# Altium PCB Base.PcbDoc
Units mm, origin at the board's own origin, x right, y up, seen from the top; angles counter-clockwise.
Board outline 79.4 x 68 mm, 4 copper layers (Top Layer, Plane 1, Plane 2, Bottom Layer), stack 1.579 mm thick; 91 components, 45 nets, 292 pads, 283 vias.
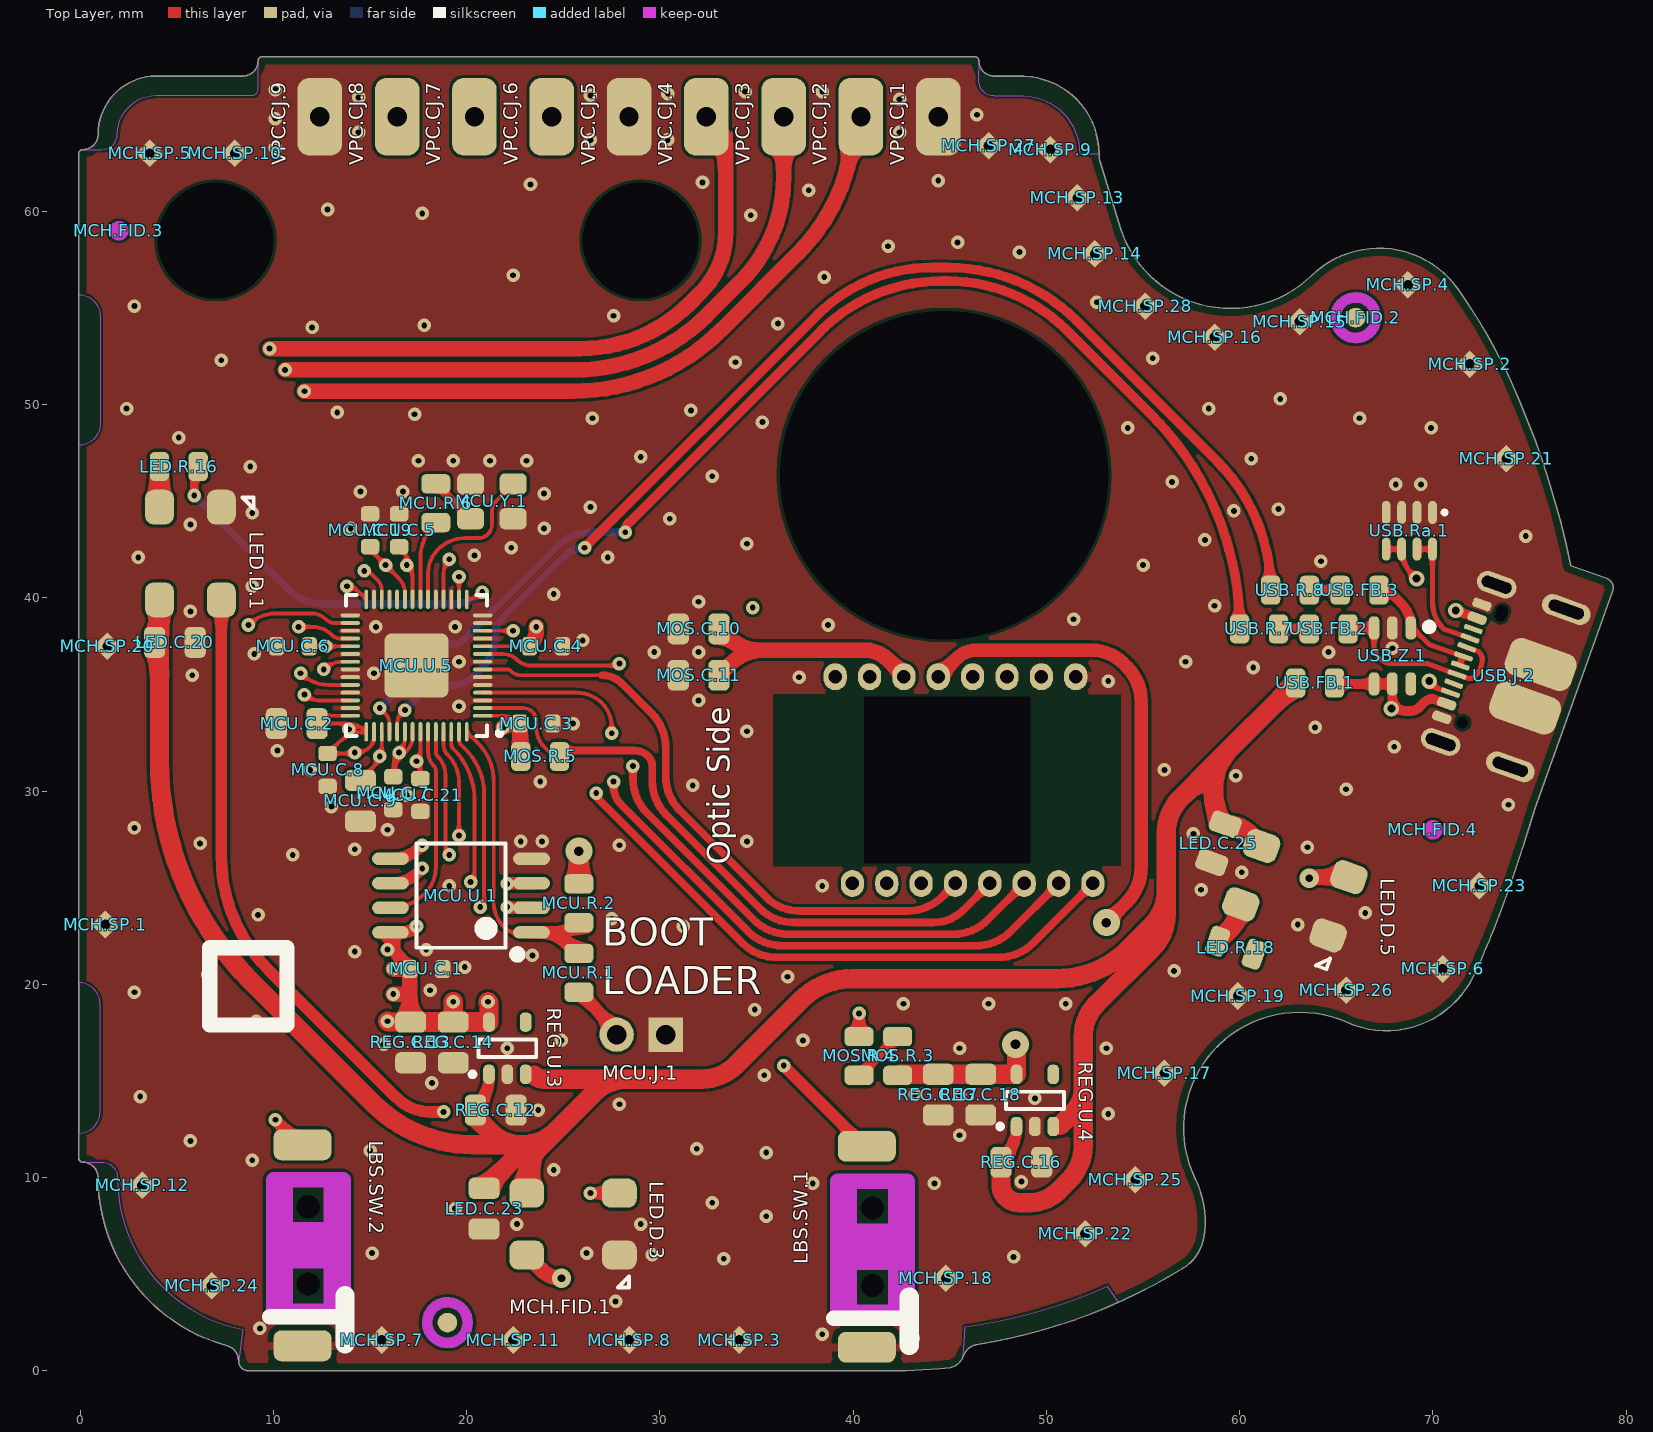
[diagram p0: Top Layer view]
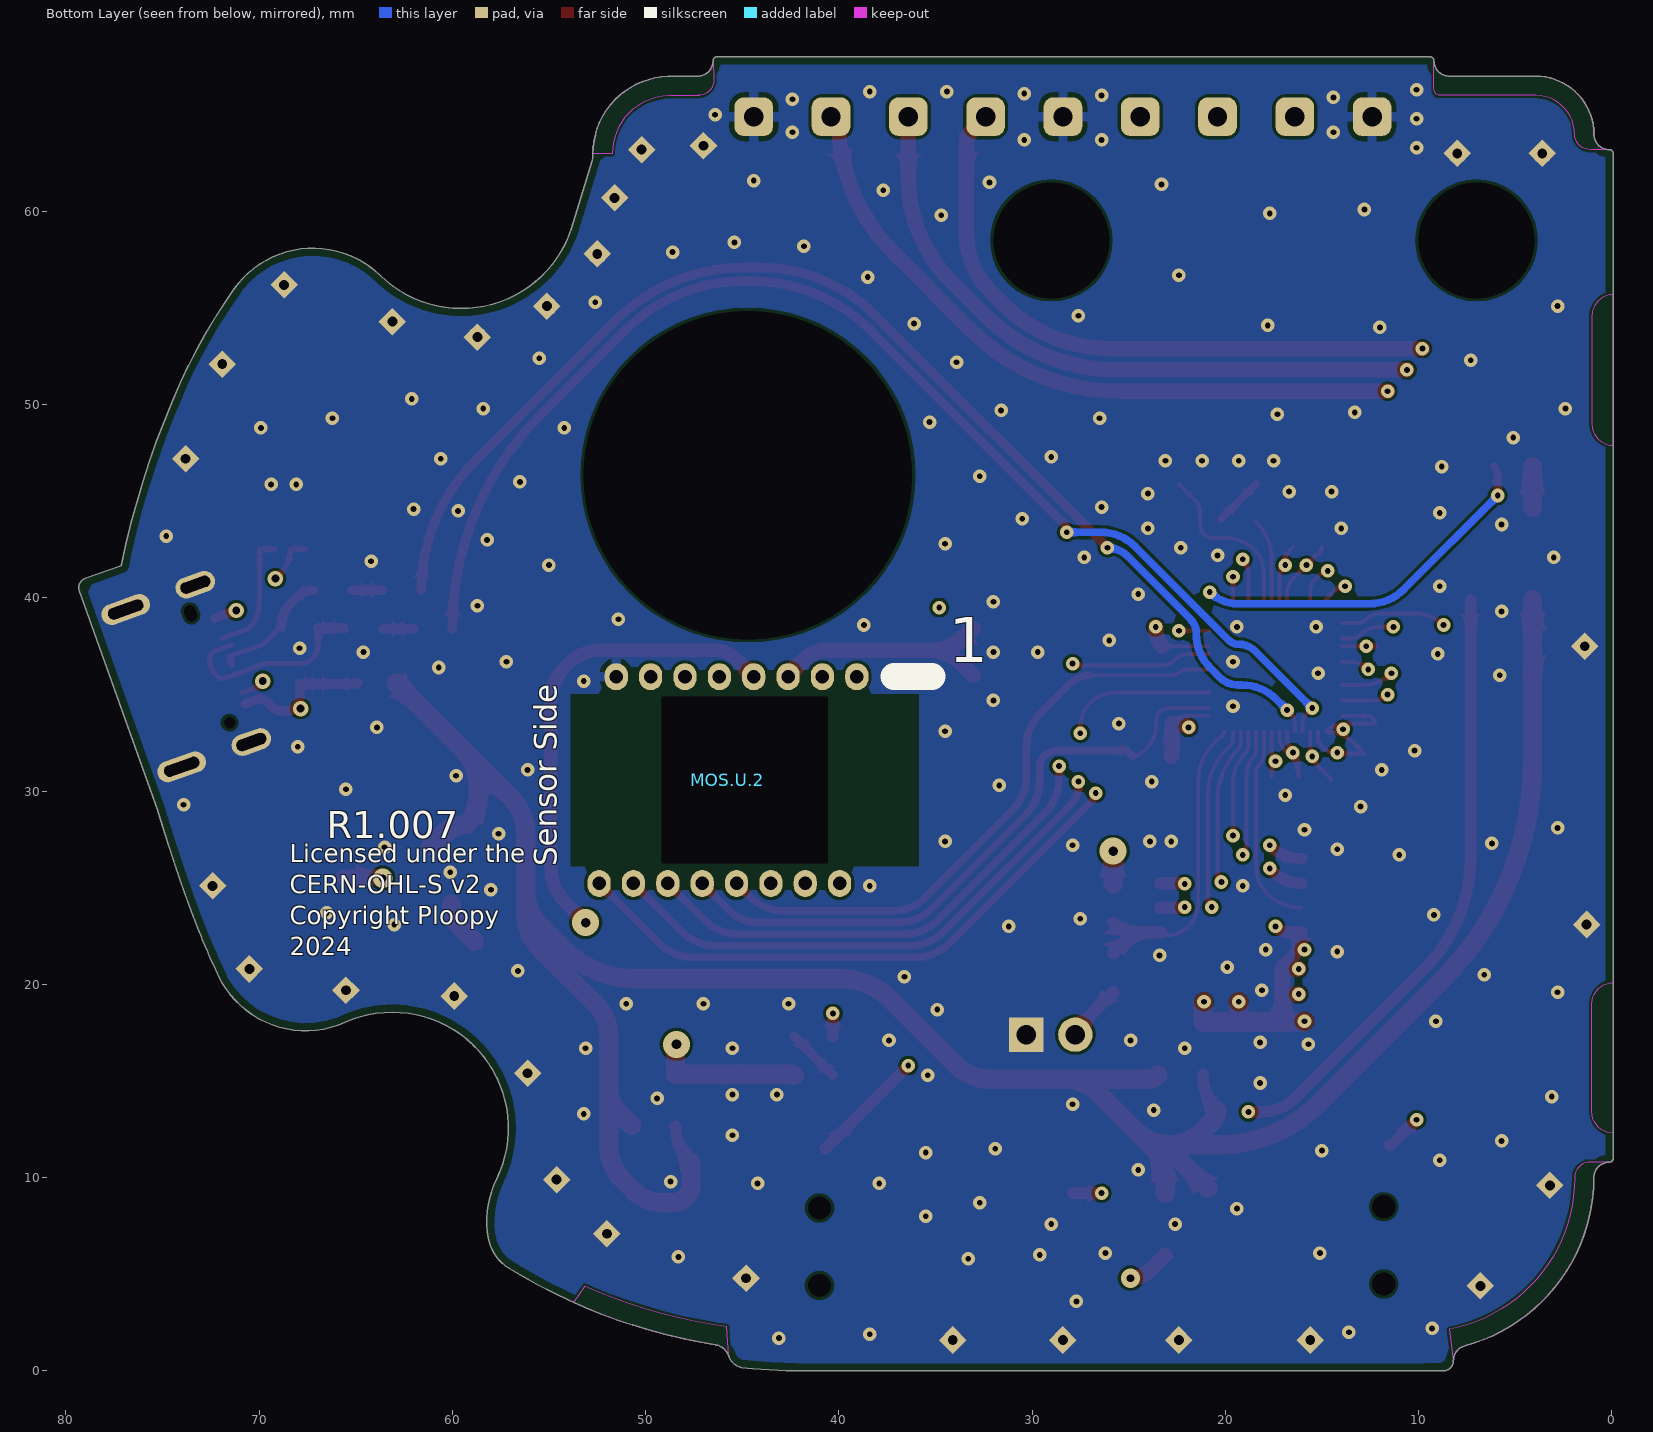
[diagram p1: Bottom Layer view, seen from below]
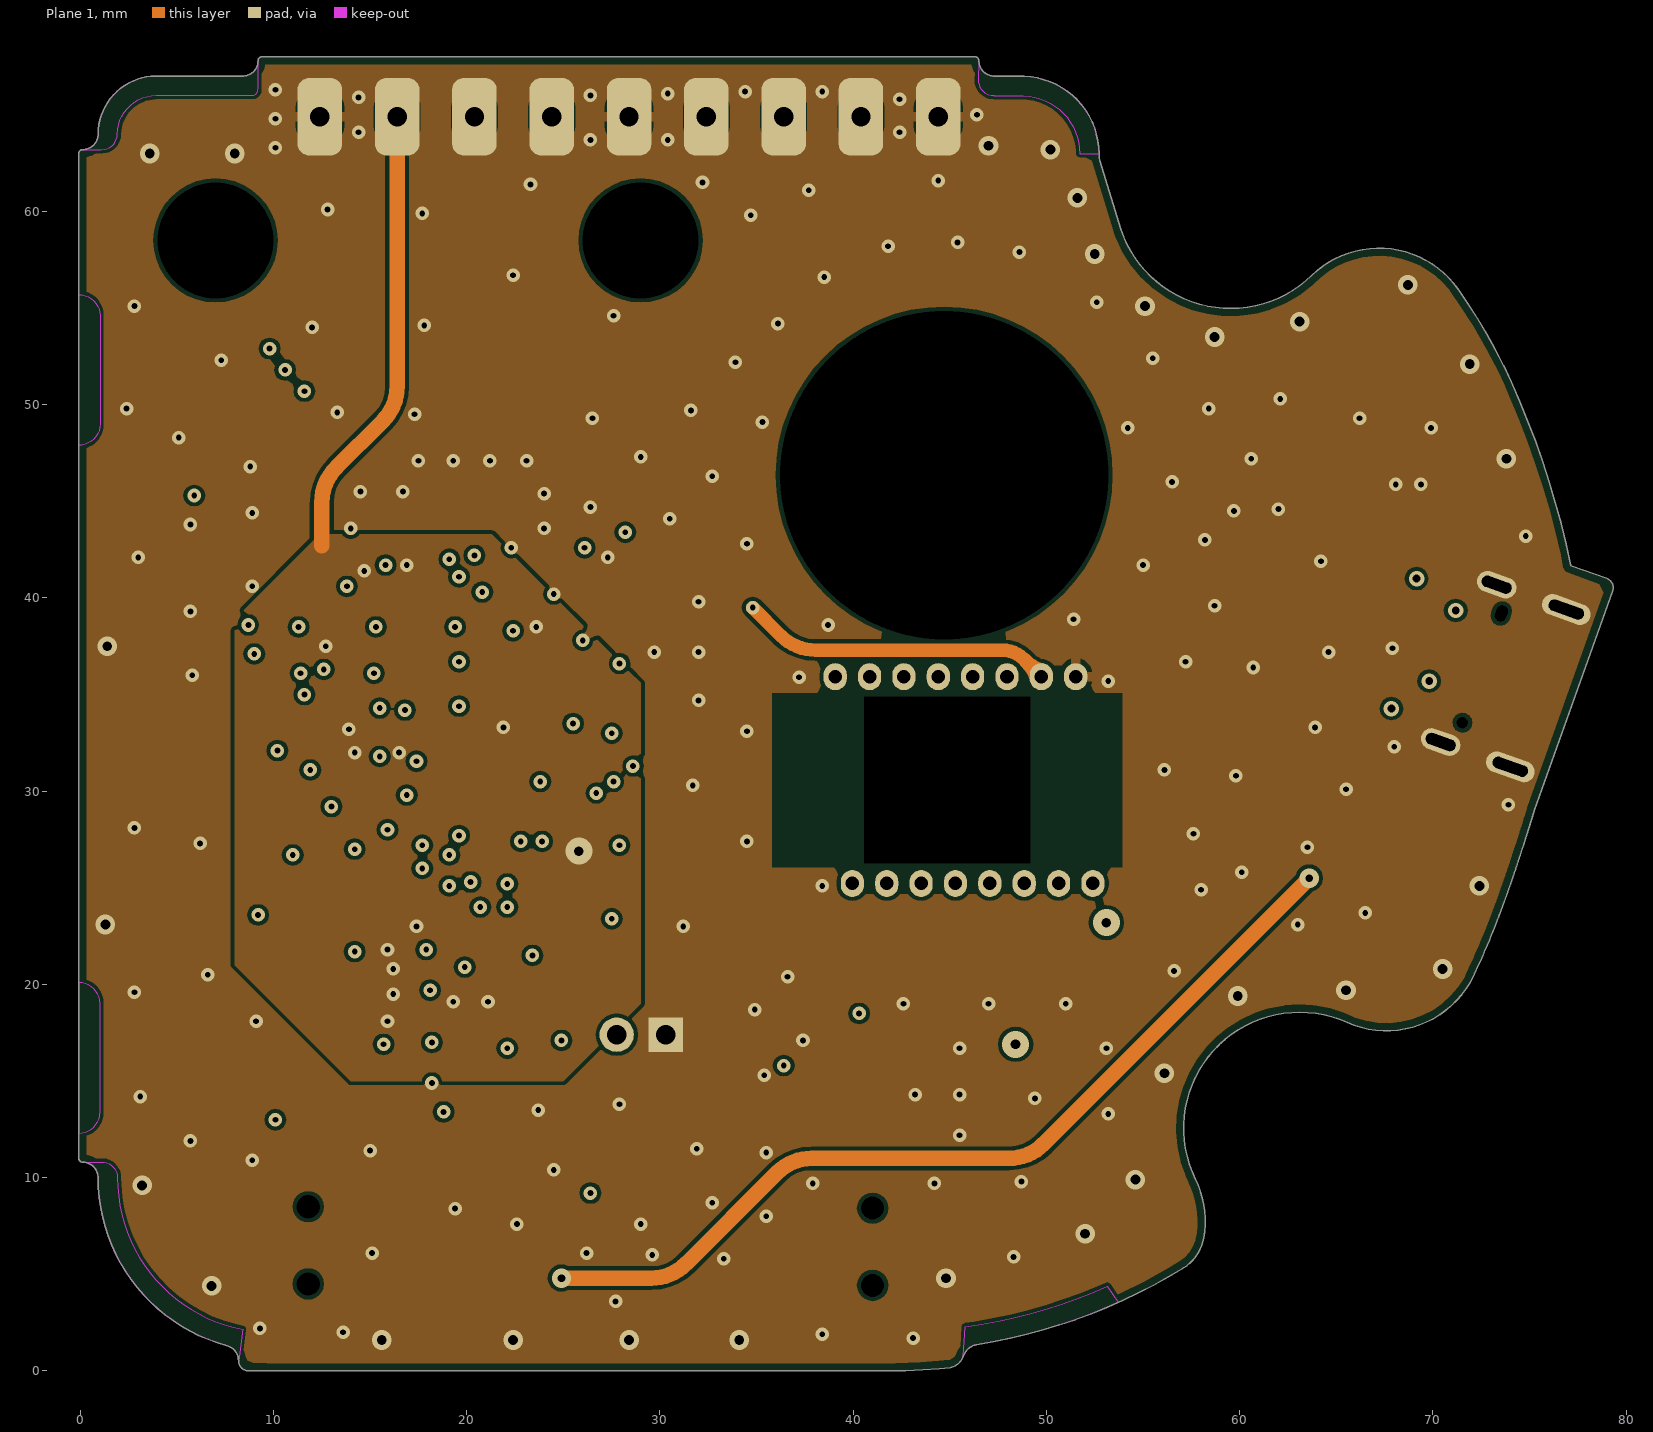
[diagram p2: Plane 1]
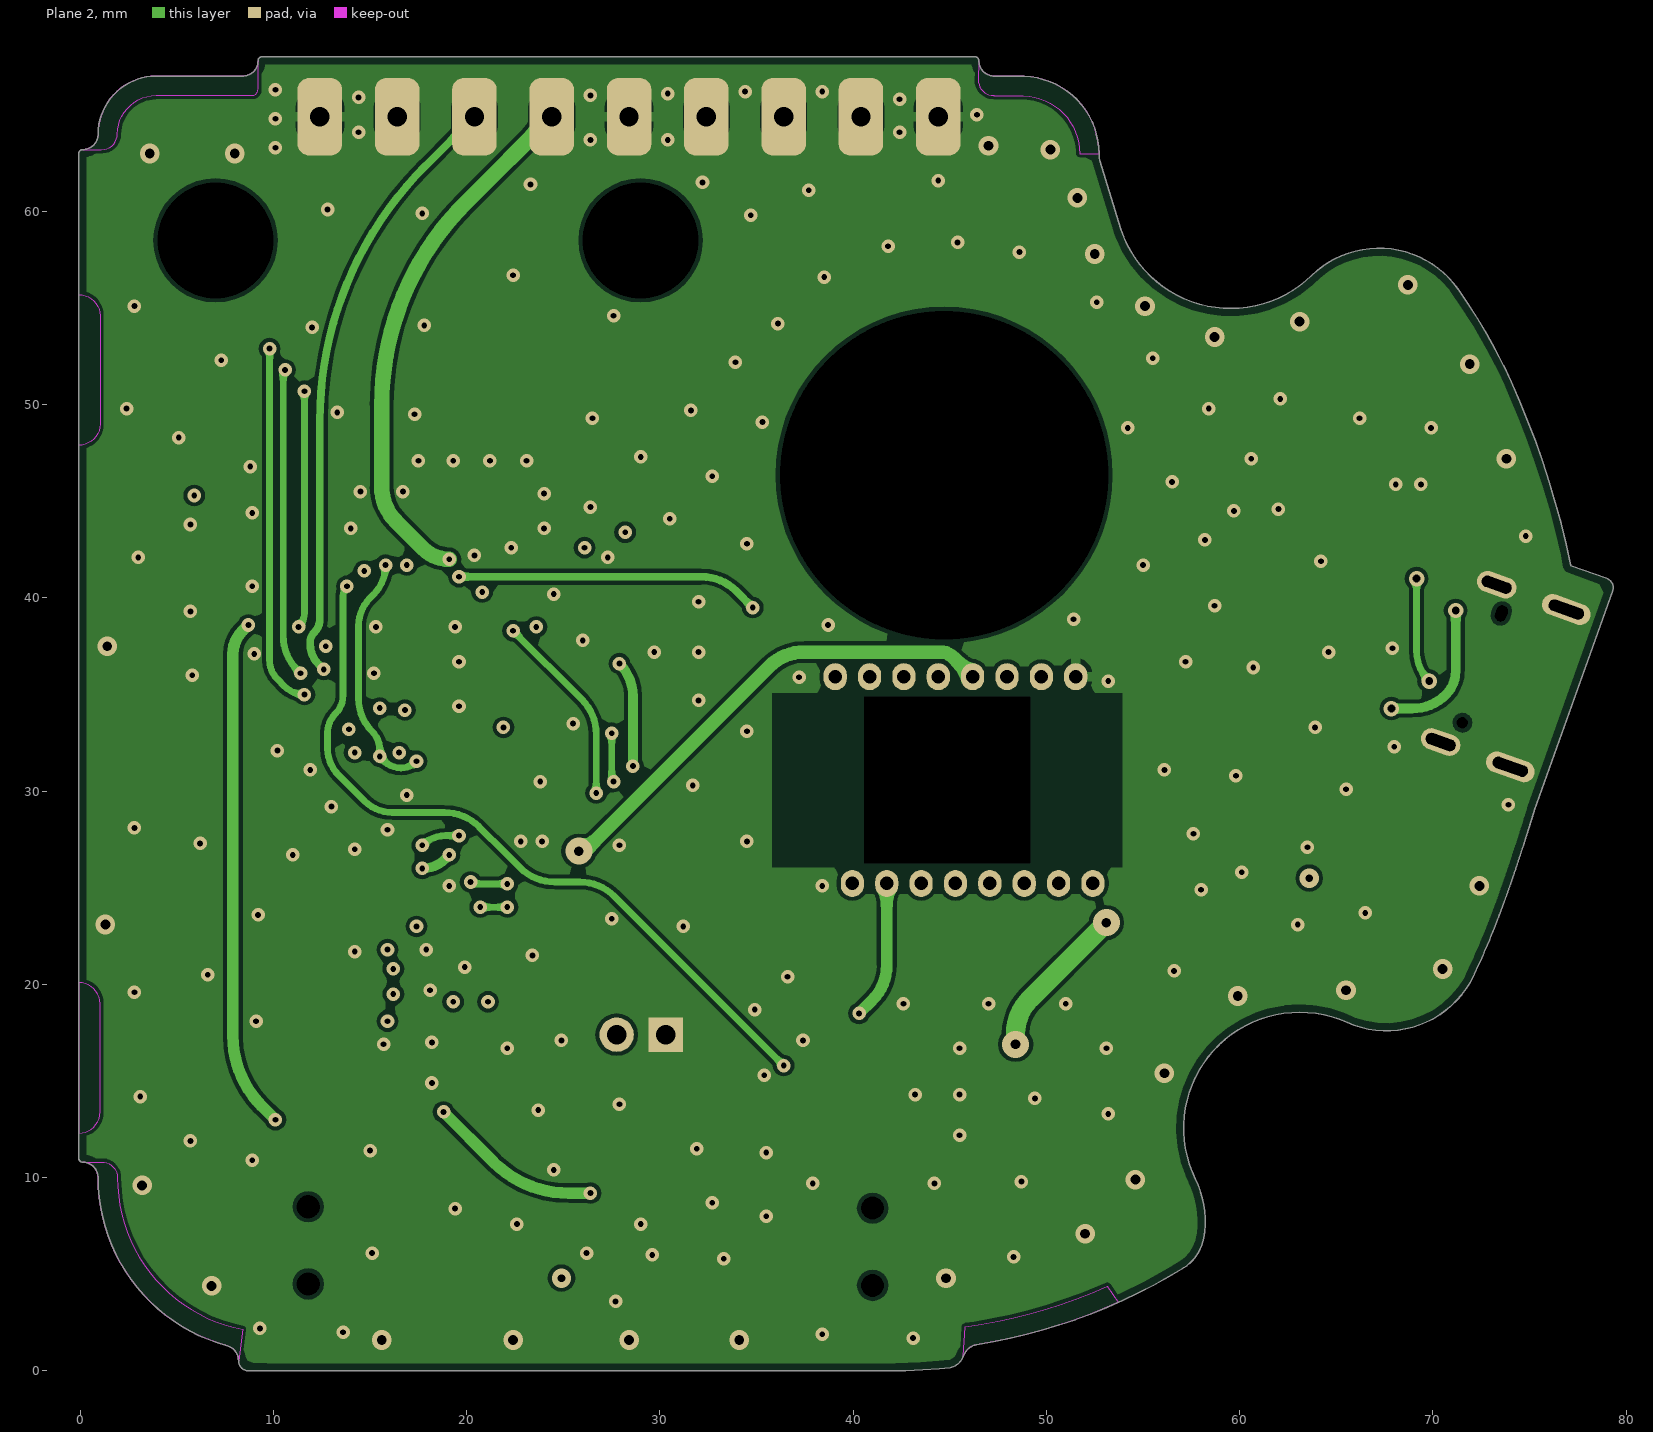
[diagram p3: Plane 2]

## Layer stack, top to bottom
Top Mask: solder mask 0.01, Solder Resist, Dk 3.5
Top Layer: signal copper 0.0356
Dielectric 1: prepreg 0.127, FR-4, Dk 4.2
Plane 1: signal copper 0.036
Dielectric 4: core 1.182, Dk 4.2
Plane 2: signal copper 0.036
Dielectric 2: prepreg 0.127, Dk 4.2
Bottom Layer: signal copper 0.0356
Bottom Solder: solder mask 0.01, Solder Resist, Dk 3.5

## Board outline
371 vertices, not listed, extent -0.073,0 79.324,68

## Design rules (kind name [scope] priority, off if disabled: settings)
BoardOutlineClearance [(Not HasFootprint('SPARKGAP'))] p1: gap=0.4 ignorepadtopadclearanceinfootprint=FALSE except(0: Arc-SplitBarrior Arc-SplitContinuation Track-SplitBarrior Track-SplitContinuation Fill-SplitBarrior Fill-SplitContinuation Poly-SplitBarrior Poly-SplitContinuation Region-SplitBarrior Region-SplitContinuation Text-SplitBarrior Text-SplitContinuation)
Clearance "HighV Pads" [(InNetClass('HighV') AND (IsPad OR IsVia)) vs IsPad OR IsVia] p1: gap=0.4 ignorepadtopadclearanceinfootprint=FALSE except(0: Arc-Hole Track-Hole SMDPad-Hole THPad-Hole Via-Hole Fill-Hole Poly-Hole Region-Hole Text-Hole) // Establishes minimum clearance between bare pads that are high voltage, per IPC2221A Table 6-1, 51-100V, condition A6
Clearance Inter-Pad [IsPad vs IsPad] p2: gap=0.15 ignorepadtopadclearanceinfootprint=FALSE
Clearance "Spark Gaps" [InNetClass('Spark Gap') vs InNet('GND') And InPoly] p3: gap=0.635 ignorepadtopadclearanceinfootprint=FALSE except(0: Arc-Hole Track-Hole SMDPad-Hole THPad-Hole Via-Hole Fill-Hole Poly-Hole Region-Hole Text-Hole)
Clearance FIDs [Name like 'FID*'] p4: gap=1.016 ignorepadtopadclearanceinfootprint=FALSE except(0: Arc-Hole Track-Hole SMDPad-Hole THPad-Hole Via-Hole Fill-Hole Poly-Hole Region-Hole Text-Hole)
Clearance "Inner Planes" [InPoly AND OnMid] p5: gap=0.2 ignorepadtopadclearanceinfootprint=FALSE // Defines a larger clearance for planes on inner layers.
Clearance "All Planes" [InPoly] p6: gap=0.15 ignorepadtopadclearanceinfootprint=FALSE // Defines minimum clearance between planes on the same layer.
Clearance "Inner Layer Clearance" [OnMid vs OnMid] p7: gap=0.15 ignorepadtopadclearanceinfootprint=FALSE // We will give inner layers more spacing because they tend to be subject to stricter process limits.
Clearance [All] p8: gap=0.1 ignorepadtopadclearanceinfootprint=FALSE // 2 oz (70um) boards require at least 10mil spacing. We give a bit more to make sure things work well.
ComponentClearance "Terminal Block" [(HasFootprint('Phoenix 1933189 - Header')) vs (HasFootprint('Phoenix 1933189 - Header'))] p1: gap=-2.286 collisioncheckmode=3 verticalgap=0.254 showdistances=FALSE
ComponentClearance "FET/TP self Clearance" [(Name like 'Q*') Or (Name like 'TP*') vs (Name like 'Q*') Or (Name like 'TP*')] p2: gap=0.254 collisioncheckmode=3 verticalgap=0.254 showdistances=FALSE
ComponentClearance [Not ((Name like 'H*') Or (Name like 'FID*') Or (Name like 'SP*')) vs Not ((Name like 'H*') Or (Name like 'FID*') Or (Name like 'SP*'))] p3: gap=0.5 collisioncheckmode=3 verticalgap=0.5 showdistances=FALSE
Height [All] p1: minheight=0 maxheight=41 prefheight=12.7
HoleSize [All] p1: absolutevalues=TRUE maxlimit=100 minlimit=0.3 maxpercent=80.000 minpercent=20.000
HoleToHoleClearance [All] p1: gap=0.6 allowstackedmicrovias=TRUE
LayerPairs [All] p1: enforce=FALSE
MinimumSolderMaskSliver [All] p1: minsoldermaskwidth=0.09
NetAntennae [Not (HasFootprint('BALANCE_RESISTOR'))] p1: netantennaetolerance=0
PasteMaskExpansion [All] p1: expansion=-0.025
PlaneClearance [All] p1: clearance=0.3
PlaneConnect [All] p1: pad.planeconnectstyle=Relief pad.reliefexpansion=0.5 pad.reliefentries=4 pad.reliefconductorwidth=0.5 pad.reliefairgap=0.25 via.planeconnectstyle=Direct via.reliefexpansion=0.5 via.reliefentries=4 via.reliefconductorwidth=0.5 via.reliefairgap=0.25
PolygonConnect "PolygonConnect Spark Gap" [HasFootprint('SparkGap')] p1: connectstyle=Direct reliefconductorwidth=0.254 reliefentries=4 polygonreliefangle="90 Angle" airgapwidth=0.254 // This rule makes it so spark gaps get direct connections to ground planes.
PolygonConnect PolygonConnect_GND [All vs InNet('GND')] p2: connectstyle=Direct reliefconductorwidth=0.5 reliefentries=4 polygonreliefangle="90 Angle" airgapwidth=0.25 // This rule specifies all vias and holes connected to a GND plane have direct connections.
PolygonConnect [All] p3: connectstyle=Direct reliefconductorwidth=0.5 reliefentries=4 polygonreliefangle="90 Angle" airgapwidth=0.25
RoutingVias [All] p1: holewidth=0.5 width=1 viastyle="Through Hole" minholewidth=0.2 minwidth=0.5 maxholewidth=6 maxwidth=10
ShortCircuit [Not (InPadClass('TraceResistorPads')) vs Not (InPadClass('TraceResistorPads'))] p1: allowed=FALSE
SilkToBoardRegionClearance [All] p1 off:
SilkToSilkClearance [All] p1 off: silktosilkclearance=0.254
SilkToSolderMaskClearance SilkscreenOverComponentPads [IsPad] p1: minsilkscreentomaskgap=0.102 clearancetoexposedcopper=FALSE
SolderMaskExpansion SolderMaskExpansion_via [IsVia] p1: expansion=0.102 istentingtop=TRUE
SolderMaskExpansion [All] p2: expansion=0.076 istentingtop=FALSE
Width [All] p1: maxlimit=50.8 minlimit=0.1 preferedwidth=0.4 midlayer2_minwidth=0.35 midlayer3_minwidth=0.35 bottomlayer_minwidth=0.26 minimp=50.000000 maximp=50.000000 favimp=50.000000
16 further rules are at their usual default settings.

## Classes and differential pairs
component class LED: LED.C.20 LED.C.23 LED.C.25 LED.D.1 LED.D.3 LED.D.5 LED.R.16 LED.R.18
component class VPC: VPC.CJ.1 VPC.CJ.2 VPC.CJ.3 VPC.CJ.4 VPC.CJ.5 VPC.CJ.6 VPC.CJ.7 VPC.CJ.8 VPC.CJ.9
component class USB: USB.FB.1 USB.FB.2 USB.FB.3 USB.J.2 USB.R.7 USB.R.8 USB.Ra.1 USB.Z.1
component class REG: REG.C.12 REG.C.13 REG.C.14 REG.C.16 REG.C.17 REG.C.18 REG.U.3 REG.U.4
component class MOS: MOS.C.10 MOS.C.11 MOS.R.3 MOS.R.4 MOS.R.5 MOS.U.2
component class MCU: MCU.C.1 MCU.C.2 MCU.C.3 MCU.C.4 MCU.C.5 MCU.C.6 MCU.C.7 MCU.C.8 MCU.C.9 MCU.C.19 MCU.C.21 MCU.J.1 MCU.R.1 MCU.R.2 MCU.R.6 MCU.U.1 MCU.U.5 MCU.Y.1
component class LBS: LBS.SW.1 LBS.SW.2
component class MCH: MCH.FID.1 MCH.FID.2 MCH.FID.3 MCH.FID.4 MCH.SP.1 MCH.SP.2 MCH.SP.3 MCH.SP.4 MCH.SP.5 MCH.SP.6 MCH.SP.7 MCH.SP.8 MCH.SP.9 MCH.SP.10 MCH.SP.11 MCH.SP.12 MCH.SP.13 MCH.SP.14 MCH.SP.15 MCH.SP.16 MCH.SP.17 MCH.SP.18 MCH.SP.19 MCH.SP.20 MCH.SP.21 MCH.SP.22 MCH.SP.23 MCH.SP.24 MCH.SP.25 MCH.SP.26 MCH.SP.27 MCH.SP.28

## Components (designator, comment, footprint, x,y, rotation, side; value= is the part's Value field where it differs from the comment)
LBS.SW.1 "D2LS-21" D2LS-21 41,6.425 r90 top (schematic designator SW1)
LBS.SW.2 "D2LS-21" D2LS-21 11.8,6.5 r90 top (schematic designator SW2)
LED.C.20 "0805" "0805 - TALL" 4.9,37.7 r270 top value="0.1uF 100V" (schematic designator C20)
LED.C.23 "0805" "0805 - TALL" 20.9,8.4 r180 top value="0.1uF 100V" (schematic designator C23)
LED.C.25 "0805" "0805 - TALL" 58.9,27.3 r160.4 top value="0.1uF 100V" (schematic designator C25)
LED.D.1 "IN-PI55TATPRPGPB" IN-PI55TATPRPGPB 5.7,42.3 r90 top (schematic designator D1)
LED.D.3 "IN-PI55TATPRPGPB" IN-PI55TATPRPGPB 25.5,7.6 r0 top (schematic designator D3)
LED.D.5 "IN-PI55TATPRPGPB" IN-PI55TATPRPGPB 62.849,24.85 r340.4 top (schematic designator D5)
LED.R.16 "0805" 0805 5.1,46.8 r90 top value="1k 1%" (schematic designator R16)
LED.R.18 "0805" 0805 59.8,21.9 r250.4 top value="1k 1%" (schematic designator R18)
MCH.FID.1 "IPC-7351 Fiducial 1mm" FIDUCIAL_1.5 19,2.5 r0 top (schematic designator FID1)
MCH.FID.2 "IPC-7351 Fiducial 1mm" FIDUCIAL_1.5 66,54.5 r0 top (schematic designator FID2)
MCH.FID.3 "1mm Fiducial for OpenPNP" FIDUCIAL-NEW 2,59 r90 top (schematic designator FID3)
MCH.FID.4 "1mm Fiducial for OpenPNP" FIDUCIAL-NEW 70,28 r90 top (schematic designator FID4)
MCH.SP.1 "Spark Gap" SparkGap 1.3,23.1 r90 top (schematic designator SP1)
MCH.SP.2 "Spark Gap" SparkGap 71.9,52.1 r90 top (schematic designator SP2)
MCH.SP.3 "Spark Gap" SparkGap 34.1,1.6 r90 top (schematic designator SP3)
MCH.SP.4 "Spark Gap" SparkGap 68.7,56.2 r90 top (schematic designator SP4)
MCH.SP.5 "Spark Gap" SparkGap 3.6,63 r90 top (schematic designator SP5)
MCH.SP.6 "Spark Gap" SparkGap 70.5,20.8 r90 top (schematic designator SP6)
MCH.SP.7 "Spark Gap" SparkGap 15.6,1.6 r90 top (schematic designator SP7)
MCH.SP.8 "Spark Gap" SparkGap 28.4,1.6 r90 top (schematic designator SP8)
MCH.SP.9 "Spark Gap" SparkGap 50.2,63.2 r90 top (schematic designator SP9)
MCH.SP.10 "Spark Gap" SparkGap 8,63 r90 top (schematic designator SP10)
MCH.SP.11 "Spark Gap" SparkGap 22.4,1.6 r90 top (schematic designator SP11)
MCH.SP.12 "Spark Gap" SparkGap 3.2,9.6 r90 top (schematic designator SP12)
MCH.SP.13 "Spark Gap" SparkGap 51.6,60.7 r90 top (schematic designator SP13)
MCH.SP.14 "Spark Gap" SparkGap 52.5,57.8 r90 top (schematic designator SP14)
MCH.SP.15 "Spark Gap" SparkGap 63.1,54.3 r90 top (schematic designator SP15)
MCH.SP.16 "Spark Gap" SparkGap 58.7,53.5 r90 top (schematic designator SP16)
MCH.SP.17 "Spark Gap" SparkGap 56.1,15.4 r90 top (schematic designator SP17)
MCH.SP.18 "Spark Gap" SparkGap 44.8,4.8 r90 top (schematic designator SP18)
MCH.SP.19 "Spark Gap" SparkGap 59.9,19.4 r90 top (schematic designator SP19)
MCH.SP.20 "Spark Gap" SparkGap 1.4,37.5 r90 top (schematic designator SP20)
MCH.SP.21 "Spark Gap" SparkGap 73.8,47.2 r90 top (schematic designator SP21)
MCH.SP.22 "Spark Gap" SparkGap 52,7.1 r90 top (schematic designator SP22)
MCH.SP.23 "Spark Gap" SparkGap 72.4,25.1 r90 top (schematic designator SP23)
MCH.SP.24 "Spark Gap" SparkGap 6.8,4.4 r90 top (schematic designator SP24)
MCH.SP.25 "Spark Gap" SparkGap 54.6,9.9 r90 top (schematic designator SP25)
MCH.SP.26 "Spark Gap" SparkGap 65.5,19.7 r90 top (schematic designator SP26)
MCH.SP.27 "Spark Gap" SparkGap 47,63.4 r90 top (schematic designator SP27)
MCH.SP.28 "Spark Gap" SparkGap 55.1,55.1 r90 top (schematic designator SP28)
MCU.C.1 "0603 X5R" "0603 capacitor - CAPC1608X06N" 17.9,20.8 r90 top value="0.1uF 25V" (schematic designator C1)
MCU.C.2 "0805 X5R" "0805 - TALL" 11.2,33.5 r90 top value="1uF 25V" (schematic designator C2)
MCU.C.3 "0603 X5R" "0603 capacitor - CAPC1608X06N" 23.6,33.5 r90 top value="0.1uF 25V" (schematic designator C3)
MCU.C.4 "0603 X5R" "0603 capacitor - CAPC1608X06N" 24.1,37.5 r90 top value="0.1uF 25V" (schematic designator C4)
MCU.C.5 "0603 X5R" "0603 capacitor - CAPC1608X06N" 16.5,43.5 r180 top value="0.1uF 25V" (schematic designator C5)
MCU.C.6 "0603 X5R" "0603 capacitor - CAPC1608X06N" 11,37.5 r270 top value="0.1uF 25V" (schematic designator C6)
MCU.C.7 "0603 X5R" "0603 capacitor - CAPC1608X06N" 16.2,29.9 r0 top value="0.1uF 25V" (schematic designator C7)
MCU.C.8 "0603 X5R" "0603 capacitor - CAPC1608X06N" 12.8,31.1 r0 top value="0.1uF 25V" (schematic designator C8)
MCU.C.9 "0805 X5R" "0805 - TALL" 14.5,29.5 r180 top value="1uF 25V" (schematic designator C9)
MCU.C.19 "0603 X5R" "0603 capacitor - CAPC1608X06N" 15,43.5 r180 top value="0.1uF 25V" (schematic designator C19)
MCU.C.21 "0603 X5R" "0603 capacitor - CAPC1608X06N" 17.6,29.8 r0 top value="0.1uF 25V" (schematic designator C21)
MCU.J.1 "HEADER2" 2x1 30.3,17.4 r270 top (schematic designator J1)
MCU.R.1 "0805" 0805 25.8,20.6 r180 top value="1k 1%" (schematic designator R1)
MCU.R.2 "0805" 0805 25.8,24.2 r0 top value="10k 1%" (schematic designator R2)
MCU.R.6 "0805" 0805 18.4,44.9 r180 top value="1k 1%" (schematic designator R6)
MCU.U.1 "W25Q16JVSSIQ" "W25Q128JVS - SOIC127P790X216-8M" 19.7,24.6 r180 top (schematic designator U1)
MCU.U.5 "RP2040" "RP2040 - QFN40P700X700X90_HS-57M" 17.4,36.5 r180 top (schematic designator U5)
MCU.Y.1 "RH100-12.000-16-3030" RH100-12.000-16-3030 21.3,45 r180 top (schematic designator Y1)
MOS.C.10 "0805" "0805 - TALL" 32,38.4 r90 top value="10uF 25V" (schematic designator C10)
MOS.C.11 "0805" "0805 - TALL" 32,36 r90 top value="0.1uF 100V" (schematic designator C11)
MOS.R.3 "0805" 0805 42.3,16.3 r0 top value="22R 1%" (schematic designator R3)
MOS.R.4 "0805" 0805 40.3,16.3 r0 top value="22R 1%" (schematic designator R4)
MOS.R.5 "0805" 0805 23.8,31.8 r270 top value="10k 1%" (schematic designator R5)
MOS.U.2 "PMW3360DM-T2QU" PMW3360DM-T2QU 39.067,35.925 r180 bottom locked (schematic designator U2)
REG.C.12 "0805" "0805 - TALL" 21.5,13.5 r270 top value="1uF 25V" (schematic designator C12)
REG.C.13 "0805" "0805 - TALL" 17.1,17 r180 top value="10uF 25V" (schematic designator C13)
REG.C.14 "0805" "0805 - TALL" 19.3,17 r180 top value="1uF 25V" (schematic designator C14)
REG.C.16 "0805" "0805 - TALL" 48.7,10.8 r270 top value="1uF 25V" (schematic designator C16)
REG.C.17 "0805" "0805 - TALL" 44.4,14.3 r180 top value="10uF 25V" (schematic designator C17)
REG.C.18 "0805" "0805 - TALL" 46.6,14.3 r180 top value="1uF 25V" (schematic designator C18)
REG.U.3 "AP2202K-3.3" "AP2202 - SOT95P270X145-5N" 22.1,16.7 r90 top (schematic designator U3)
REG.U.4 "AP2204K-1.8" "AP2202 - SOT95P270X145-5N" 49.4,14 r90 top (schematic designator U4)
USB.FB.1 "ACML-0805-601-T" 0805 63.9,35.6 r270 top (schematic designator FB1)
USB.FB.2 "ACML-0805-601-T" 0805 64.6,38.4 r270 top (schematic designator FB2)
USB.FB.3 "ACML-0805-601-T" 0805 66.2,40.4 r270 top (schematic designator FB3)
USB.J.2 "DX07S016JA1R1500" DX07S016JA1R1500 74.32,35.733 r70.4 top (schematic designator J2)
USB.R.7 "0805" 0805 61,38.4 r270 top value="22R 1%" (schematic designator R7)
USB.R.8 "0805" 0805 62.6,40.4 r270 top value="22R 1%" (schematic designator R8)
USB.Ra.1 "1206 Quad" "4x 10k 1% - CAC-80P320X160-8M" 68.775,43.475 r270 top value="10k 1%" (schematic designator Ra1)
USB.Z.1 "IP4220CZ6,125" "PESD3V3S4UD - SOT95P275X110-6N" 67.9,37 r270 top (schematic designator Z1)
VPC.CJ.1 "PCBJointCastellationJoint" PCBJoint 44.4,64.9 r0 top (schematic designator CJ1)
VPC.CJ.2 "PCBJointCastellationJoint" PCBJoint 40.4,64.9 r0 top (schematic designator CJ2)
VPC.CJ.3 "PCBJointCastellationJoint" PCBJoint 36.4,64.9 r0 top (schematic designator CJ3)
VPC.CJ.4 "PCBJointCastellationJoint" PCBJoint 32.4,64.9 r0 top (schematic designator CJ4)
VPC.CJ.5 "PCBJointCastellationJoint" PCBJoint 28.4,64.9 r0 top (schematic designator CJ5)
VPC.CJ.6 "PCBJointCastellationJoint" PCBJoint 24.4,64.9 r0 top (schematic designator CJ6)
VPC.CJ.7 "PCBJointCastellationJoint" PCBJoint 20.4,64.9 r0 top (schematic designator CJ7)
VPC.CJ.8 "PCBJointCastellationJoint" PCBJoint 16.4,64.9 r0 top (schematic designator CJ8)
VPC.CJ.9 "PCBJointCastellationJoint" PCBJoint 12.4,64.9 r0 top (schematic designator CJ9)

## Footprints (in the part's own frame and the unit in brackets; to place one, negate y for a bottom-side part, rotate by r counter-clockwise, add the part's x,y. Pads: shape width x height; smd on the part's side, far side on the other; paste and mask are expansions set on the pad)
2x1 [mil]
  rect 70x70 hole 40 paste-3897.64: 1(0,0)
  round 70 hole 40 paste-3897.64: 2(0,-100)
  body extent -50,-150 50,50, height 339
"4x 10k 1% - CAC-80P320X160-8M" [mm] "Chip Array, Concave, 8-Leads, Pitch 0.80mm,  Body 3.20x1.60mm,  IPC Low Density"
  oval 1.2x0.45 smd paste-99: 1(-0.95,1.2) 2(-0.95,0.4) 3(-0.95,-0.4) 4(-0.95,-1.2) 5(0.95,-1.2) 6(0.95,-0.4) 7(0.95,0.4) 8(0.95,1.2)
  silkscreen extent -1,1.78 -0.9,1.88, body extent -0.9,-1.7 0.9,1.7, height 0.6
"0603 capacitor - CAPC1608X06N" [mm] "Chip Capacitor, 2-Leads, Body 1.60x0.80mm, IPC Medium Density"
  rrect50% 0.95x0.8 smd: 1(0,-0.85) 2(0,0.85)
  body extent -0.45,-0.85 0.45,0.85, height 0.6
0805 [mm] "Chip Capacitor, 2-Leads, Body 2.0x1.3mm, IPC Medium Density"
  rrect50% 1.5x1 smd paste+0: 1(0,1.002) 2(0,-1.002)
  body extent -0.72,-1.1 0.72,1.1, height 0.8
"0805 - TALL" [mm] "Same as 0805 footprint, but solder mask is adjusted to leave more paste behind for tall (>0.9mm) components like big caps, which tend to be solder-starved on the regular footprint."
  rrect50% 1.6x1.1 smd paste+0: 1(0,1.052) 2(0,-1.052)
  body extent -0.72,-1.1 0.72,1.1, height 0.8
"AP2202 - SOT95P270X145-5N" [mm] "SOT23, 5-Leads, Body 2.92x2.70mm, Pitch 0.95mm, IPC Medium Density"
  rrect80% 1x0.6 smd paste-0.04: 1(-1.35,0.95) 2(-1.35,0) 3(-1.35,-0.95) 4(1.35,-0.95) 5(1.35,0.95)
  silkscreen extent -1.47,-1.5 0.45,1.92, body extent -0.85,-1.52 0.85,1.52, height 1.45
D2LS-21 [mm]
  rrect50% 1.6x3 smd paste-0.04: A(-5.2,0.3) B(5.2,0.3)
  round 0 hole 1.2 unplated: ""(-2,0) ""(2,0)
  Top Layer keep-out lines w0.8: -0.8,1.8 -0.8,-1.8 ; 0,1.8 0,-1.7 ; 0.8,1.8 0.8,-1.7 ; -3.4,1.2 3.4,1.2 ; -3.4,-1.2 3.4,-1.2 ; -3.4,1.8 3.4,1.8 3.4,-1.8 -3.4,-1.8 -3.4,1.8
  silkscreen extent -5.1,-2 -2.6,2, body extent -5.6,-2.4 5.6,2.4, height 3.19
DX07S016JA1R1500 [mm] "USB-C (USB TYPE-C) USB 2.0 Receptacle Connector 24 (16+8 Dummy) Position Surface Mount, Right Angle; Through Hole"
  rrect70% 0.5x1 smd paste-0.04 mask+0.05: 1(-3.1,3) 2(-2.35,3) 11(2.35,3) 12(3.1,3)
  rrect70% 0.27x1 smd paste-0.02 mask+0.05: 3(-1.75,3) 4(-1.25,3) 5(-0.75,3) 6(-0.25,3) 7(0.25,3) 8(0.75,3) 9(1.25,3) 10(1.75,3)
  rrect100% 1.1x2.1 hole 0.6 slot 1.6 at 90 deg paste-99 mask+0.1: SHELL(-4.32,2.625) SHELL(4.32,2.625)
  rrect100% 1.1x2.6 hole 0.6 slot 1.9 at 90 deg paste-99 mask+0.1: SHELL(-4.32,-1.2) SHELL(4.32,-1.2)
  rrect60% 2x3.6 smd paste-0.12 mask+0.05: SHELL(-1.2,-0.9) SHELL(1.2,-0.9)
  round 0 hole 0.6: ""(-3,1.9)
  round 0 hole 0.6 slot 0.85 at 180 deg: ""(3,1.9)
  body extent -4.47,-3.65 4.47,3.25, height 3.18
FIDUCIAL-NEW [mm]
  Top Layer keep-out circle w0.6: c0,0 r0.2
FIDUCIAL_1.5 [mil]
  round 40 smd paste-60 mask+30: 1(0,0)
  Top Layer keep-out circle w21.65: c0,0 r41.34
IN-PI55TATPRPGPB [mm]
  rrect60% 1.8x1.5 smd paste-0.04 mask+0.06: 1(-2.4,1.6) 2(-2.4,-1.6) 3(2.4,-1.6) 4(2.4,1.6)
  silkscreen extent 2.32,-3.27 2.9,-2.7, body extent -2.5,-2.5 2.5,2.5, height 1.6
PCBJoint [mm]
  rrect50% 2.3x4 / inner rrect50% 2.3x4 / far side rrect50% 2x2 hole 1 paste-99: 1(0,0)
"PESD3V3S4UD - SOT95P275X110-6N" [mm] "SOT23, 6-Leads, Body 2.90x2.75mm, Pitch 0.95mm, IPC Medium Density"
  rrect80% 1.2x0.55 smd paste-0.03 mask+0.085: 1(-1.45,0.95) 2(-1.45,0) 3(-1.45,-0.95) 4(1.45,-0.95) 5(1.45,0) 6(1.45,0.95)
  silkscreen extent -1.62,1.78 -1.38,2.02, body extent -0.85,-1.55 0.85,1.55, height 1.1
PMW3360DM-T2QU [mm]
  oval 1.2x1.4 hole 0.7: 1(0,0) 2(-1.778,0) 3(-3.556,0) 4(-5.334,0) 5(-7.112,0) 6(-8.89,0) 7(-10.668,0) 8(-12.446,0) 9(-13.335,-10.7) 10(-11.557,-10.7) 11(-9.779,-10.7) 12(-8.001,-10.7) 13(-6.223,-10.7) 14(-4.445,-10.7) 15(-2.667,-10.7) 16(-0.889,-10.7)
  rect 0x0 hole 8.6 square unplated: ""(-5.8,-5.35)
  silkscreen extent 1.92,0 3.9,0, body extent -16.06,-14.76 5.09,4.09, height 2.44
RH100-12.000-16-3030 [mm] "3.2mm x 2.5mm crystal"
  rrect50% 1.4x1.1 smd paste-0.1: 1(-1.1,-0.9) 2(1.1,-0.9) 3(1.1,0.9) 4(-1.1,0.9)
  body extent -1.6,-1.25 1.6,1.25, height 1
"RP2040 - QFN40P700X700X90_HS-57M" [mm] "QFN, 56-Leads, Body 7.00x7.00mm, Pitch 0.40mm, Thermal Pad 3.10x3.10mm, IPC Low Density"
  oval 1x0.2 smd paste-99 mask+0.05: 1(-3.425,2.6) 2(-3.425,2.2) 3(-3.425,1.8) 4(-3.425,1.4) 5(-3.425,1) 6(-3.425,0.6) 7(-3.425,0.2) 8(-3.425,-0.2) 9(-3.425,-0.6) 10(-3.425,-1) 11(-3.425,-1.4) 12(-3.425,-1.8) 13(-3.425,-2.2) 14(-3.425,-2.6) 29(3.425,-2.6) 30(3.425,-2.2) 31(3.425,-1.8) 32(3.425,-1.4) 33(3.425,-1) 34(3.425,-0.6) 35(3.425,-0.2) 36(3.425,0.2) 37(3.425,0.6) 38(3.425,1) 39(3.425,1.4) 40(3.425,1.8) 41(3.425,2.2) 42(3.425,2.6)
  oval 0.2x1 smd paste-99 mask+0.05: 15(-2.6,-3.425) 16(-2.2,-3.425) 17(-1.8,-3.425) 18(-1.4,-3.425) 19(-1,-3.425) 20(-0.6,-3.425) 21(-0.2,-3.425) 22(0.2,-3.425) 23(0.6,-3.425) 24(1,-3.425) 25(1.4,-3.425) 26(1.8,-3.425) 27(2.2,-3.425) 28(2.6,-3.425) 43(2.6,3.425) 44(2.2,3.425) 45(1.8,3.425) 46(1.4,3.425) 47(1,3.425) 48(0.6,3.425) 49(0.2,3.425) 50(-0.2,3.425) 51(-0.6,3.425) 52(-1,3.425) 53(-1.4,3.425) 54(-1.8,3.425) 55(-2.2,3.425) 56(-2.6,3.425)
  rrect20% 3.3x3.3 smd paste-99: 57(0,0)
  silkscreen extent -4.43,-3.65 3.65,3.65, body extent -3.5,-3.5 3.5,3.5, height 0.9
SparkGap [mil]
  rect 40x40 smd rot 45 paste-99 mask+4: 1(0,0)
  rect 40x40 smd far side rot 45 paste-99 mask+4: 1(0,0)
"W25Q128JVS - SOIC127P790X216-8M" [mm] "SOIC, 8-Leads, Body 5.28x5.28mm, Pitch 1.27mm, IPC Low Density"
  oval 1.9x0.65 smd paste-0.05: 1(-3.65,1.905) 2(-3.65,0.635) 3(-3.65,-0.635) 4(-3.65,-1.905) 5(3.65,-1.905) 6(3.65,-0.635) 7(3.65,0.635) 8(3.65,1.905)
  silkscreen extent -3.05,-2.7 2.3,3.17, body extent -2.7,-2.7 2.7,2.7, height 2.16

## Part data
LBS.SW.1 LBS.SW.2: "Compact Surface-mounting Switch for long durability", Supplier Part Number 1=Z4378CT-ND, Supplier 1=Digi-Key, Supplier 2=Mouser, Supplier Part Number 2=653-D2LS-21
LED.C.20 LED.C.23 LED.C.25 MOS.C.11: library part "Cap 0.1uF 100V", "0805, X5R or better", Supplier Part Number 1=1276-6840-2-ND, Supplier 1=Digi-Key
LED.D.1 LED.D.3 LED.D.5: "ADDRESS LED DISCRETE SERIAL RGB", Supplier Part Number 1=1830-1204-1-ND, Supplier 1=Digi-Key, Supplier 2=Arrow, Supplier 3=Mouser, Supplier Part Number 2=IN-PI55TATPRPGPB, Supplier Part Number 3=743-IN-PI55TATPRPGPB
LED.R.16 LED.R.18 MCU.R.1 MCU.R.6: library part "Res 1k 1% 0805", "Chip resistor, 1/8W 100PPM", Supplier Part Number 1=RMCF0805FT1K00TR-ND, Supplier 1=Digi-Key
MCH.FID.1 MCH.FID.2: library part FIDUCIAL_1.5, PNP-A=1, PNP-da=0, PNP-dx=0, PNP-dy=0, PNP-FeedType=Fiducial, PNP-Level=1, PNP-Lv=1, PNP-Nzl=2, PNP-PlacePriority=0, PNP-Pt=0, PNP-TapeIndex=0, PNP-TapeWidth=0, PNP-Thk=1.02, PNP-TS=70, PNP-Type=MARK1, PNP-Voff=0, PNP-W=0, PNP-X=4, PNP-Y=4
MCH.FID.3 MCH.FID.4: library part FIDUCIAL_NEW, "This fiducial is designed to work with OpenPNP. It presents a circular pattern under the solder mask, to prevent glare issues from messing with the detection.", PNP-A=1, PNP-da=0, PNP-dx=0, PNP-dy=0, PNP-FeedType=Fiducial, PNP-Level=1, PNP-Lv=1, PNP-Nzl=2, PNP-PlacePriority=0, PNP-Pt=0, PNP-TapeIndex=0, PNP-TapeWidth=0, PNP-Thk=1.02, PNP-TS=70, PNP-Type=MARK1, PNP-Voff=0, PNP-W=0, PNP-X=4, PNP-Y=4
MCH.SP.1 MCH.SP.2 MCH.SP.3 MCH.SP.4 MCH.SP.5 MCH.SP.6 MCH.SP.7 MCH.SP.8 MCH.SP.9 MCH.SP.10 MCH.SP.11 MCH.SP.12 MCH.SP.13 MCH.SP.14 MCH.SP.15 MCH.SP.16 MCH.SP.17 MCH.SP.18 MCH.SP.19 MCH.SP.20 MCH.SP.21 MCH.SP.22 MCH.SP.23 MCH.SP.24 MCH.SP.25 MCH.SP.26 MCH.SP.27 MCH.SP.28: "Open square pad for spark gapping", PNP-A=0, PNP-da=0, PNP-dx=0, PNP-dy=0, PNP-FeedType=Tape, PNP-Level=1, PNP-Lv=1, PNP-Nzl=2, PNP-PlacePriority=1, PNP-Pt=0, PNP-TapeIndex=1, PNP-TapeWidth=8, PNP-Thk=1, PNP-TS=70, PNP-Type=CHI, PNP-Voff=0, PNP-W=0, PNP-X=1, PNP-Y=1
MCU.C.1 MCU.C.3 MCU.C.4 MCU.C.5 MCU.C.6 MCU.C.7 MCU.C.8 MCU.C.19 MCU.C.21: library part "Cap 0.1uF 25V", "0603, X5R or better", Supplier Part Number 1=1276-6840-2-ND, Supplier 1=Digi-Key
MCU.C.2 MCU.C.9 REG.C.12 REG.C.14 REG.C.16 REG.C.18: library part "Cap 1uF 25V", "0805, X5R or better", Supplier Part Number 1=1276-1066-2-ND, Supplier 1=Digi-Key, Supplier 2=Digi-Key, Supplier Part Number 2=1276-1066-1-ND
MCU.J.1: "2-pin 0.100\" header", Supplier Part Number 1=855-M20-9990245, Supplier 1=Mouser, Supplier 2=Digi-Key, Supplier Part Number 2=952-2261-ND
MCU.R.2 MOS.R.5: library part "Res 10k 1% 0805", "Chip resistor", Supplier Part Number 1=RMCF0805FT10K0TR-ND, Supplier 1=Digi-Key
MCU.U.1: Supplier Part Number 1=W25Q16JVSSIQ-ND, Supplier 1=Digi-Key
MCU.U.5: Supplier Part Number 1=49AJ8740, Supplier 1=Newark
MCU.Y.1: "12MHz Crystal 16pF 100 Ohms 4-SMD, No Lead (3.2mm x 2.5mm)", Supplier Part Number 1=XC2686CT-ND, Supplier 1=Digi-Key, Supplier 2=Mouser, Supplier Part Number 2=520-160-12-30B-AGMT
MOS.C.10 REG.C.13 REG.C.17: library part "Cap 10uF 25V", "0805, X5R or better", Supplier Part Number 1=81-GRM21BR61E106KA3L, Supplier 1=Mouser, Supplier 2=Digi-Key, Supplier Part Number 2=490-5523-1-ND
MOS.R.3 MOS.R.4 USB.R.7 USB.R.8: library part "Res 22R 1% 0805", "Chip resistor", Supplier Part Number 1=RMCF0805FT22R0CT-ND, Supplier 1=Digi-Key, Supplier 2=Arrow, Supplier Part Number 2=RMCF0805FT22R0
  USB.R.7 USB.R.8: PNP-A=0, PNP-da=0, PNP-dx=0, PNP-dy=0, PNP-FeedType=Tape, PNP-Level=1, PNP-Lv=1, PNP-Nzl=2, PNP-PlacePriority=1, PNP-Pt=0, PNP-TapeIndex=1, PNP-TapeWidth=8, PNP-Thk=0.55, PNP-TS=70, PNP-Type=chi, PNP-Voff=0, PNP-W=0, PNP-X=2.00, PNP-Y=1.25
MOS.U.2: "Optical Gaming Navigation Sensor"
REG.U.3: "3.3V 150mA LDO regulator", Supplier Part Number 1=621-AP2202K-3.3TRG1, Supplier 1=Mouser, Supplier 2=Digi-Key, Supplier 3=Arrow, Supplier Part Number 2=AP2202K-3.3TRG1DICT-ND, Supplier Part Number 3=PWagzdsTFFHKE_U17B45SP-NtndBrheJIaI5hB7gHD0ZVywxIBNyoAQstvnyfZZ0
REG.U.4: "Linear Voltage Regulator IC 1 Output 150mA SOT-23-5", Supplier Part Number 1=AP2204K-1.8TRG1DICT-ND, Supplier 1=Digi-Key, Supplier 2=Mouser, Supplier Part Number 2=621-AP2204K-1.8TRG1
USB.FB.1 USB.FB.2 USB.FB.3: "FERRITE BEAD 600 OHM 0805 1LN", Supplier Part Number 1=535-12556-1-ND, PNP-A=0, PNP-da=0, PNP-dx=0, PNP-dy=0, PNP-FeedType=Tape, PNP-Level=1, PNP-Lv=1, PNP-Nzl=2, PNP-PlacePriority=1, PNP-Pt=0, PNP-TapeIndex=1, PNP-TapeWidth=8, PNP-Thk=0.55, PNP-TS=70, PNP-Type=chi, PNP-Voff=0, PNP-W=0, PNP-X=2.00, PNP-Y=1.25, Supplier 1=Digi-Key
USB.J.2: "USB-C (USB TYPE-C) USB 2.0 Receptacle Connector 24 (16+8 Dummy) Position Surface Mount, Right Angle; Through Hole", Supplier Part Number 1=670-DX07S016JA1R1500CT-ND, Supplier 1=Digi-Key, Supplier 2=Mouser, Supplier Part Number 2=656-DX07S016JA1R1500
USB.Ra.1: library part "Quad Res 10k 1% 1206", "Chip resistor"
USB.Z.1: "TVS DIODE 5.5V 6TSOP (Low capacitance, USB)", PNP-A=270, PNP-da=0, PNP-dx=0, PNP-dy=0, PNP-FeedType=Tape, PNP-Level=1, PNP-Lv=26, PNP-Nzl=2, PNP-PlacePriority=3, PNP-Pt=0, PNP-TapeIndex=1, PNP-TapeWidth=8, PNP-Thk=1, PNP-TS=90, PNP-Type=CHP, PNP-Voff=0, PNP-W=0, PNP-X=2.9, PNP-Y=1.3
VPC.CJ.1 VPC.CJ.2 VPC.CJ.3 VPC.CJ.4 VPC.CJ.5 VPC.CJ.6 VPC.CJ.7 VPC.CJ.8 VPC.CJ.9: library part PCBJoint, "Pad for soldering a castellated PCB edge. Easy way to join two PCBs together."

## Free pads (board coordinates)
  round 0 hole 6: ""(7,58.5) ""(29,58.5)
  round 0 hole 17: ""(44.7,46.359)

## Via types
v1: diameter 0.7, hole 0.3, Top Layer to Bottom Layer, tented both sides, 246 vias
v2: diameter 1.016, hole 0.508, Top Layer to Bottom Layer, tented both sides, 28 vias
v3: diameter 0.8, hole 0.4, Top Layer to Bottom Layer, tented both sides, 4 vias
v4: diameter 1.4, hole 0.5, Top Layer to Bottom Layer, tented both sides, 3 vias
v5: diameter 1, hole 0.4, Top Layer to Bottom Layer, tented both sides, 2 vias

## Nets (pads, with @x,y where several pads share a name; then routed paths per layer and width w, separated by ;. In a path a pad name is that pad's centre, name@x,y a point inside that pad or via, vN(x,y) a via of type N, cw(c..) or ccw(c..) an arc to the next point about the centre after c; other vN are vias at no path point)
1V1: MCU.C.9.2 MCU.C.19.2 MCU.C.21.2 MCU.U.5.23 MCU.U.5.45 MCU.U.5.50 | length 21.4
  Top Layer w0.2: MCU.C.9.2 cw(c14.615,30.552) 14.534,30.634 15.2,31.3 ccw(c14.234,32.266) 15.6,32.266 MCU.U.5.45 ; MCU.C.19.2 ccw(c15.362,42.65) 15.106,42.394 v1(15.803,41.697) 16.5,41 cw(c15.776,40.276) 16.792,40.406 cw(c16.4,40.325) 16.8,40.325 MCU.U.5.23 ; MCU.C.21.2@17.6,30.75 MCU.U.5.50
  Plane 2 w0.35: v1(15.803,41.697) cw(c13.645,41.697) 15.171,40.171 15,40 ccw(c16.449,38.551) 14.4,38.551 14.4,34.79 ccw(c16.79,34.79) 15.1,33.1 cw(c14.134,32.134) 15.5,32.134 v1(15.5,31.8) 15.746,31.554 ccw(c16.6,32.407) 16.6,31.2 ccw(c16.6,32.29) 17.371,31.519 v1(17.4,31.548)
1V8: MOS.R.3.2 MOS.U.2.4 REG.C.17.2 REG.C.18.2 REG.U.4.5 | length 40.5
  Top Layer w0.7: MOS.U.2.4 45.335,36.859 cw(c46.4,35.794) 46.4,37.3 52.31,37.3 cw(c52.31,34.91) 54,36.6 54.156,36.444 cw(c52.36,34.648) 54.9,34.648 54.9,26.052 cw(c52.36,26.052) 54.156,24.256 v4(53.1,23.2)
  Top Layer w1: MOS.R.3.2 cw(c42.426,15.171) 42.426,15.35 REG.U.4.5 48.45,16.779 ccw(c48.279,16.779) v4(48.4,16.9)
  Plane 2 w1: v4(48.4,16.9) 48.4,17.448 cw(c50.94,17.448) 49.144,19.244 v4(53.1,23.2)
3V3: MCU.C.1.2 MCU.C.2.2 MCU.C.3.2 MCU.C.4.2 MCU.C.5.2 MCU.C.6.2 MCU.C.7.2 MCU.C.8.2 MCU.R.2.1 MCU.U.1.8 MCU.U.5.1 MCU.U.5.10 MCU.U.5.22 MCU.U.5.26 MCU.U.5.33 MCU.U.5.42 MCU.U.5.43 MCU.U.5.44 MCU.U.5.48 MCU.U.5.49 MOS.R.5.2 MOS.U.2.5 REG.C.13.2 REG.C.14.2 REG.U.3.5 VPC.CJ.8.1 | length 95.8
  Top Layer w0.2: MCU.C.6.2@12.15,37.5 MCU.U.5.33 ; MCU.U.5.42 12.652,33.9 ccw(c12.652,33.5) MCU.C.2.2 13.774,33.5 cw(c13.774,32.049) MCU.U.5.43 ccw(c14.8,30.963) 13.306,32.456 MCU.C.8.2 14.155,31.95 ccw(c14.155,33.145) 15,32.3 ccw(c14.517,32.783) 15.2,32.783 MCU.U.5.44 ; v1(14.7,41.4) cw(c14.7,40.917) 15.041,41.259 15.4,40.9 cw(c14.917,40.417) 15.6,40.417 MCU.U.5.26 ; MCU.C.5.2 cw(c14.81,40.96) 17.2,40.96 MCU.U.5.22 ; MCU.U.5.48 16.8,32.675 cw(c16.4,32.675) 16.799,32.649 cw(c16.117,32.683) 16.6,32.2 ccw(c17.566,31.234) 16.2,31.234 MCU.C.7.2 cw(c17.769,30.75) 16.66,31.86 16.9,32.1 ccw(c16.176,32.824) 17.2,32.824 MCU.U.5.49 ; MCU.U.5.1 21.784,33.9 cw(c21.784,32.534) MCU.C.3.2 ; MCU.U.5.10 MCU.C.4.2
  Top Layer w0.65: MCU.C.1.2 16.683,21.167 cw(c18.211,22.695) MCU.U.1.8 16.664,22.695 ccw(c16.664,23.736) v1(17.4,23)
  Top Layer w0.8: v1(16.2,19.5) 17.018,19.5 cw(c17.018,19.454) 17.05,19.487 ; v1(16.2,20.8) MCU.C.1.2 17.05,19.487 ; REG.C.13.2 cw(c17.221,18.173) 17.05,18.173 17.05,19.487 ; v1(21.9,33.3) cw(c22.383,32.817) 22.383,33.5 MCU.C.3.2 22.75,31.915 ccw(c22.913,31.915) MOS.R.5.2 ; MCU.C.4.2 ccw(c22.405,38.345) 23.6,38.345 v1(23.6,38.5)
  Top Layer w1: v1(15.9,18.1) ccw(c16.015,18.215) 16.015,18.052 REG.C.13.2 17.102,18.05 REG.U.3.5 21.15,18.979 ccw(c20.979,18.979) v1(21.1,19.1) ; REG.C.14.2 v1(19.3,19.1) ; MCU.R.2.1 v4(25.8,26.9)
  Plane 2 w0.7: v4(25.8,26.9) ccw(c25.8,27.624) 26.312,27.112 35.656,36.456 cw(c37.452,34.66) 37.452,37.2 44.5,37.2 cw(c44.5,36.225) 45.19,36.914 MOS.U.2.5
  Plane 1 w0.8: 12.5,42.7 12.5,44.948 cw(c15.04,44.948) 13.244,46.744 15.656,49.156 ccw(c13.86,50.952) 16.4,50.952 VPC.CJ.8.1
  other v1: 15.9,21.8 14.2,32 16.5,32 13.9,33.2 12.7,37.5 16.9,41.7
GND: LBS.SW.1.A LBS.SW.2.A LED.C.20.1 LED.C.23.1 LED.C.25.1 LED.D.1.3 LED.D.3.3 LED.D.5.3 MCH.SP.1.1 MCH.SP.2.1 MCH.SP.3.1 MCH.SP.4.1 MCH.SP.5.1 MCH.SP.6.1 MCH.SP.7.1 MCH.SP.8.1 MCH.SP.9.1 MCH.SP.10.1 MCH.SP.11.1 MCH.SP.12.1 MCH.SP.13.1 MCH.SP.14.1 MCH.SP.15.1 MCH.SP.16.1 MCH.SP.17.1 MCH.SP.18.1 MCH.SP.19.1 MCH.SP.20.1 MCH.SP.21.1 MCH.SP.22.1 MCH.SP.23.1 MCH.SP.24.1 MCH.SP.25.1 MCH.SP.26.1 MCH.SP.27.1 MCH.SP.28.1 MCU.C.1.1 MCU.C.2.1 MCU.C.3.1 MCU.C.4.1 MCU.C.5.1 MCU.C.6.1 MCU.C.7.1 MCU.C.8.1 MCU.C.9.1 MCU.C.19.1 MCU.C.21.1 MCU.J.1.1 MCU.U.1.4 MCU.U.5.3 MCU.U.5.5 MCU.U.5.6 MCU.U.5.8 MCU.U.5.11 MCU.U.5.13 MCU.U.5.14 MCU.U.5.17 MCU.U.5.19 MCU.U.5.27 MCU.U.5.29 MCU.U.5.31 MCU.U.5.34 MCU.U.5.36 MCU.U.5.37 MCU.U.5.39 MCU.U.5.41 MCU.U.5.57 MCU.Y.1.2 MCU.Y.1.4 MOS.C.10.1 MOS.C.11.1 MOS.U.2.8 REG.C.12.1 REG.C.13.1 REG.C.14.1 REG.C.16.1 REG.C.17.1 REG.C.18.1 REG.U.3.2 REG.U.4.2 USB.J.2.1 USB.J.2.12 USB.J.2.SHELL USB.Ra.1.1 USB.Ra.1.2 USB.Ra.1.3 USB.Ra.1.4 USB.Z.1.2 VPC.CJ.1.1 VPC.CJ.5.1 VPC.CJ.9.1
  other v1: 43.1,1.7 38.4,1.9 13.6,2 9.3,2.2 27.7,3.6 33.3,5.8 48.3,5.9 29.6,6 15.1,6.1 26.2,6.1 22.6,7.6 29,7.6 35.5,8 19.4,8.4 32.7,8.7 37.9,9.7 44.2,9.7 48.7,9.8 24.5,10.4 8.9,10.9 35.5,11.3 15,11.4 31.9,11.5 5.7,11.9 45.5,12.2 53.2,13.3 23.7,13.5 27.9,13.8 49.4,14.1 3.1,14.2 43.2,14.3 45.5,14.3 18.2,14.9 35.4,15.3 22.1,16.7 45.5,16.7 53.1,16.7 15.7,16.9 18.2,17 24.9,17.1 37.4,17.1 9.1,18.1 34.9,18.7 42.6,19 47,19 51,19 2.8,19.6 18.1,19.7 36.6,20.4 6.6,20.5 56.6,20.7 19.9,20.9 23.4,21.5 14.2,21.7 17.9,21.8 31.2,23 63,23.1 27.5,23.4 9.2,23.6 66.5,23.7 58,24.9 19.1,25.1 38.4,25.1 60.1,25.8 11,26.7 14.2,27 63.5,27.1 27.9,27.2 6.2,27.3 22.8,27.4 23.9,27.4 34.5,27.4 57.6,27.8 15.9,28 2.8,28.1 13,29.2 73.9,29.3 16.9,29.8 65.5,30.1 31.7,30.3 23.8,30.5 59.8,30.8 11.9,31.1 56.1,31.1 10.2,32.1 68,32.3 34.5,33.1 63.9,33.3 25.5,33.5 19.6,34.4 32,34.7 53.2,35.7 37.2,35.9 5.8,36 15.2,36.1 60.7,36.4 19.6,36.7 57.2,36.7 9,37.1 29.7,37.2 32,37.2 64.6,37.2 67.9,37.4 26,37.8 15.3,38.5 19.4,38.5 38.7,38.6 51.4,38.9 5.7,39.3 58.7,39.6 32,39.8 24.5,40.2 8.9,40.6 55,41.7 64.2,41.9 3,42.1 27.3,42.1 20.4,42.2 22.3,42.6 34.5,42.8 58.2,43 74.8,43.2 14,43.6 24,43.6 5.7,43.8 30.5,44.1 8.9,44.4 59.7,44.5 62,44.6 26.4,44.7 24,45.4 14.5,45.5 16.7,45.5 68.075,45.875 69.375,45.875 56.5,46 32.7,46.3 8.8,46.8 17.5,47.1 19.3,47.1 21.2,47.1 23.1,47.1 60.6,47.2 29,47.3 5.1,48.3 54.2,48.8 69.9,48.8 35.3,49.1 26.5,49.3 66.2,49.3 17.3,49.5 13.3,49.6 31.6,49.7 2.4,49.8 58.4,49.8 62.1,50.3 33.9,52.2 7.3,52.3 55.5,52.4 12,54 17.8,54.1 36.1,54.2 27.6,54.6 2.8,55.1 52.6,55.3 38.5,56.6 22.4,56.7 48.6,57.9 41.8,58.2 45.4,58.4 34.7,59.8 17.7,59.9 12.8,60.1 37.7,61.1 23.3,61.4 32.2,61.5 44.4,61.6 10.1,63.3 26.4,63.7 30.4,63.7 14.4,64.1 42.4,64.1 10.1,64.8 46.4,65 42.4,65.8 14.4,65.9 26.4,66 30.4,66.1 34.4,66.2 38.4,66.2 10.1,66.3
  other v2: 15.6,1.6 22.4,1.6 28.4,1.6 34.1,1.6 6.8,4.4 44.8,4.8 52,7.1 3.2,9.6 54.6,9.9 56.1,15.4 59.9,19.4 65.5,19.7 70.5,20.8 1.3,23.1 72.4,25.1 1.4,37.5 73.8,47.2 71.9,52.1 58.7,53.5 63.1,54.3 55.1,55.1 68.7,56.2 52.5,57.8 51.6,60.7 3.6,63 8,63 50.2,63.2 47,63.4
LEDData: LED.R.16.2 MCU.U.5.15 | length 19.7
  Top Layer w0.2: MCU.U.5.15 ccw(c20,40.951) 20.726,40.226 v1(20.8,40.3)
  Top Layer w0.4: v1(5.9,45.3) 5.9,46.311 cw(c6.591,46.311) LED.R.16.2
  Bottom Layer w0.4: v1(5.9,45.3) 10.756,40.444 ccw(c12.552,42.24) 12.552,39.7 19.351,39.7 ccw(c19.351,41.749) v1(20.8,40.3)
NetLBS.SW.1_B: LBS.SW.1.B MCU.U.5.28 | length 46.4
  Top Layer w0.2: v1(13.8,40.6) cw(c13.8,39.815) 14.355,40.37 MCU.U.5.28
  Top Layer w0.6: v1(36.4,15.8) LBS.SW.1.B@40.7,11.5
  Plane 2 w0.35: v1(13.8,40.6) ccw(c14.283,40.117) 13.6,40.117 13.6,34.966 cw(c12.234,34.966) 13.2,34 ccw(c14.166,33.034) 12.8,33.034 12.8,32.2 ccw(c14.731,32.2) 13.366,30.834 14.7,29.5 ccw(c16.149,30.949) 16.149,28.9 18.848,28.9 cw(c18.848,26.36) 20.644,28.156 22,26.8 22.756,26.044 ccw(c24.552,27.84) 24.552,25.3 25.848,25.3 cw(c25.848,22.76) 27.644,24.556 v1(36.4,15.8)
NetLBS.SW.2_B: LBS.SW.2.B MCU.U.5.30 | length 34
  Top Layer w0.2: v1(8.7,38.6) cw(c10.149,37.151) 10.149,39.2 11.976,39.2 cw(c11.976,38.176) 12.7,38.9 ccw(c13.183,39.383) 13.183,38.7 MCU.U.5.30
  Top Layer w0.6: v1(10.1,13) 11.329,11.771 ccw(c11.5,11.941) LBS.SW.2.B
  Plane 2 w0.6: v1(8.7,38.6) 8.4,38.3 ccw(c9.607,37.093) 7.9,37.093 7.9,17.331 ccw(c13.046,17.331) 9.407,13.693 v1(10.1,13)
NetLED.D.1_2: LED.D.1.2 LED.D.3.4 | length 42.4
  Top Layer w0.6: LED.D.1.2 7.3,26.638 ccw(c15.601,26.638) 9.731,20.769 16.356,14.144 ccw(c18.152,15.94) 18.152,13.4 v1(18.8,13.4) ; v1(26.4,9.2) LED.D.3.4
  Plane 2 w0.6: v1(18.8,13.4) 21.393,10.807 ccw(c25.273,14.687) 25.273,9.2 v1(26.4,9.2)
NetLED.D.1_4: LED.D.1.4 LED.R.16.1 | length 2.1
  Top Layer w1: LED.R.16.1 4.098,44.702 LED.D.1.4
NetLED.D.3_2: LED.D.3.2 LED.D.5.4 | length 51.2
  Top Layer w0.8: LED.D.3.2 23.876,5.224 ccw(c24.9,6.249) v5(24.9,4.8) ; v5(63.6,25.5) cw(c63.725,25.375) 63.725,25.552 LED.D.5.4
  Plane 1 w0.8: v5(24.9,4.8) 29.548,4.8 ccw(c29.548,7.34) 31.344,5.544 36.056,10.256 cw(c37.852,8.46) 37.852,11 48.048,11 ccw(c48.048,13.54) 49.844,11.744 v5(63.6,25.5)
NetLED.D.5_2: LED.D.5.2 LED.R.18.2 | length 2.3
  Top Layer w1: LED.R.18.2 59.546,22.927 ccw(c58.325,24.147) LED.D.5.2
NetMCU.J.1_2: MCU.J.1.2 MCU.R.1.1 | length 3
  Top Layer w0.65: MCU.R.1.1 27.592,17.806 cw(c27.186,17.4) MCU.J.1.2
NetMCU.R.1_2: MCU.R.1.2 MCU.R.2.2 MCU.U.1.1 MCU.U.5.56 | length 17.3
  Top Layer w0.2: MCU.U.5.56 20.564,32.511 cw(c18.546,30.493) 21.4,30.493 21.4,24.207 ccw(c23.107,24.207) 21.9,23 ccw(c22.993,24.093) 22.993,22.547 MCU.U.1.1
  Top Layer w0.65: MCU.U.1.1 MCU.U.1.1@23.655,22.695 ; MCU.R.1.2 25.451,21.951 ccw(c23.655,20.155) MCU.U.1.1@23.655,22.695 ; MCU.R.2.2 cw(c24.587,24.411) 24.587,22.695 MCU.U.1.1@23.655,22.695
NetMCU.R.6_1: MCU.R.6.1 MCU.U.5.21 | length 4.2
  Top Layer w0.2: MCU.U.5.21 17.6,42.045 cw(c20.14,42.045) 18.344,43.842 MCU.R.6.1
NetMCU.R.6_2: MCU.R.6.2 MCU.Y.1.3 | length 2.5
  Top Layer w0.4: MCU.R.6.2 18.4,45.9 MCU.Y.1.3
NetMCU.U.1_2: MCU.U.1.2 MCU.U.5.55 | length 12.2
  Top Layer w0.2: MCU.U.5.55 19.6,32.641 ccw(c19.941,32.641) 19.7,32.4 19.956,32.144 cw(c17.677,29.865) 20.9,29.865 20.9,24.2 v1(20.7,24)
  Top Layer w0.65: v1(22.1,24) ccw(c22.184,24.085) 22.184,23.965 MCU.U.1.2
  Plane 2 w0.35: v1(20.7,24) v1(22.1,24)
NetMCU.U.1_3: MCU.U.1.3 MCU.U.5.54 | length 11.4
  Top Layer w0.2: MCU.U.5.54 19.2,32.441 ccw(c19.541,32.441) 19.3,32.2 cw(c16.644,29.544) 20.4,29.544 20.4,25.5 v1(20.2,25.3)
  Top Layer w0.65: v1(22.1,25.2) cw(c22.184,25.116) 22.184,25.235 MCU.U.1.3
  Plane 2 w0.35: v1(20.2,25.3) 20.2,25.241 20.241,25.2 v1(22.1,25.2)
NetMCU.U.1_5: MCU.U.1.5 MCU.U.5.53 | length 9.5
  Top Layer w0.2: MCU.U.5.53 18.8,32.383 ccw(c19.483,32.383) 19,31.9 cw(c17.551,30.451) 19.6,30.451 v1(19.6,27.7)
  Top Layer w0.6: MCU.U.1.5 ccw(c16.05,28.811) 17.68,27.18 v1(17.7,27.2)
  Plane 2 w0.35: v1(17.7,27.2) cw(c18.907,25.993) 18.907,27.7 v1(19.6,27.7)
NetMCU.U.1_6: MCU.U.1.6 MCU.U.5.52 | length 10.1
  Top Layer w0.2: MCU.U.5.52 18.4,32.041 ccw(c18.741,32.041) 18.5,31.8 cw(c17.534,30.834) 18.9,30.834 18.9,27.183 ccw(c19.583,27.183) v1(19.1,26.7)
  Top Layer w0.6: MCU.U.1.6 ccw(c16.05,27.372) 17.561,25.861 v1(17.7,26)
  Plane 2 w0.5: v1(17.7,26) ccw(c17.7,27.69) 18.895,26.495 v1(19.1,26.7)
NetMCU.U.1_7: MCU.U.1.7 MCU.U.5.51 | length 10.6
  Top Layer w0.2: MCU.U.1.7 ccw(c16.05,26.489) 17.835,24.704 ccw(c16.47,26.069) 18.4,26.069 18.4,31.059 ccw(c18.059,31.059) 18.3,31.3 cw(c19.024,32.024) 18,32.024 MCU.U.5.51
NetMCU.U.5_2: MCU.U.5.2 MOS.R.5.1 MOS.U.2.12 | length 33.3
  Top Layer w0.2: MCU.U.5.2 22.917,34.3 cw(c22.917,33.617) 23.4,34.1 cw(c22.917,33.617) 23.6,33.617 23.6,33.3 ccw(c25.049,33.3) 24.024,32.276 24.286,32.014 ccw(c24.802,32.53) MOS.R.5.1
  Top Layer w0.4: MOS.R.5.1 25.102,32.1 28.676,32.1 cw(c28.676,31.076) 29.4,31.8 cw(c28.917,31.317) 29.6,31.317 29.6,30.552 ccw(c32.14,30.552) 30.344,28.756 35.156,23.944 ccw(c36.952,25.74) 36.952,23.2 44.132,23.2 ccw(c44.132,25.399) 45.687,23.844 MOS.U.2.12
NetMCU.U.5_4: MCU.U.5.4 MOS.U.2.10 | length 38.6
  Top Layer w0.2: MCU.U.5.4 25.676,35.1 cw(c25.676,33.227) 27,34.551 cw(c25.793,33.344) 27.5,33.344 v1(27.5,33)
  Top Layer w0.4: v1(27.6,30.5) 27.6,30.235 ccw(c28.89,30.235) 27.978,29.322 34.556,22.744 ccw(c36.352,24.54) 36.352,22 46.347,22 ccw(c46.347,24.54) 48.143,22.744 MOS.U.2.10
  Plane 2 w0.35: v1(27.5,33) 27.5,30.741 ccw(c27.841,30.741) v1(27.6,30.5)
NetMCU.U.5_7: MCU.U.5.7 MOS.U.2.13 | length 31.8
  Top Layer w0.2: MCU.U.5.7 22.059,36.3 cw(c22.059,35.959) 22.3,36.2 ccw(c22.783,36.683) 22.783,36 27,36
  Top Layer w0.4: 27,36 cw(c27,34.551) 28.024,35.576 ; 28.024,35.576 29.556,34.044 cw(c27.76,32.248) 30.3,32.248 30.3,30.777 ccw(c32.84,30.777) 31.044,28.981 35.679,24.345 ccw(c37.252,26.34) 37.252,23.8 42.813,23.8 ccw(c42.813,26.34) 44.609,24.544 MOS.U.2.13
NetMCU.U.5_9: MCU.U.5.9 MOS.U.2.11 | length 38.4
  Top Layer w0.2: MCU.U.5.9 21.876,37.1 cw(c21.876,36.076) 22.6,36.8 ccw(c23.324,37.524) 23.324,36.5 27.8,36.5 v1(27.9,36.6)
  Top Layer w0.4: v1(28.6,31.3) 28.6,30.652 ccw(c31.14,30.652) 29.344,28.856 34.856,23.344 ccw(c36.652,25.14) 36.652,22.6 45.169,22.6 ccw(c45.169,25.14) 46.965,23.344 MOS.U.2.11
  Plane 2 w0.5: v1(27.9,36.6) cw(c26.21,34.91) 28.6,34.91 v1(28.6,31.3)
NetMCU.U.5_12: MCU.U.5.12 MOS.U.2.9 | length 42.3
  Top Layer w0.2: MCU.U.5.12 v1(22.4,38.3)
  Top Layer w0.4: v1(26.7,29.9) ccw(c27.183,29.9) 26.841,29.559 34.256,22.144 ccw(c36.052,23.94) 36.052,21.4 47.525,21.4 ccw(c47.525,23.94) 49.321,22.144 MOS.U.2.9
  Plane 2 w0.35: v1(22.4,38.3) 25.956,34.744 cw(c24.16,32.948) 26.7,32.948 v1(26.7,29.9)
NetMCU.U.5_16: MCU.U.5.16 MOS.U.2.7 | length 33.2
  Top Layer w0.2: MCU.U.5.16 v1(19.6,41.1)
  Plane 2 w0.4: v1(19.6,41.1) 32.148,41.1 cw(c32.148,38.56) 33.944,40.356 v1(34.8,39.5)
  Plane 1 w0.7: v1(34.8,39.5) 36.256,38.044 ccw(c38.052,39.84) 38.052,37.3 47.7,37.3 cw(c47.7,35.707) 48.827,36.833 MOS.U.2.7
NetMCU.U.5_18: MCU.U.5.18 VPC.CJ.6.1 | length 29.8
  Top Layer w0.2: MCU.U.5.18 18.8,41.276 cw(c19.824,41.276) v1(19.1,42)
  Plane 2 w0.8: v1(19.1,42) cw(c19.1,43.931) 17.734,42.566 16.344,43.956 cw(c18.14,45.752) 15.6,45.752 15.6,49.972 cw(c30.395,49.972) 19.933,60.433 VPC.CJ.6.1
NetMCU.U.5_20: MCU.U.5.20 MCU.Y.1.1 | length 8.6
  Top Layer w0.2: MCU.U.5.20 18,41.293 cw(c19.707,41.293) 18.5,42.5 cw(c19.949,41.051) 19.949,43.1 20.617,43.1 ccw(c20.617,43.783) 21.1,43.3 ccw(c20.617,43.783) 21.3,43.783 21.3,44.4 cw(c22.266,44.4) 21.583,45.083 MCU.Y.1.1
NetMCU.U.5_32: MCU.U.5.32 VPC.CJ.2.1 | length 51.2
  Top Layer w0.2: v1(11.3,38.5) 12.034,38.5 cw(c12.034,37.134) 13,38.1 ccw(c13.483,38.583) 13.483,37.9 MCU.U.5.32
  Top Layer w0.8: v1(11.6,50.7) 25.513,50.7 ccw(c25.513,61.533) 33.173,53.873 37.169,57.869 ccw(c30.297,64.741) 40.015,64.741 VPC.CJ.2.1
  Plane 2 w0.35: v1(11.3,38.5) ccw(c10.576,39.224) 11.6,39.224 v1(11.6,50.7)
NetMCU.U.5_35: MCU.U.5.35 VPC.CJ.7.1 | length 33
  Top Layer w0.2: v1(12.6,36.3) cw(c13.566,35.334) 13.566,36.7 MCU.U.5.35
  Plane 2 w0.4: v1(12.6,36.3) 12.324,36.576 cw(c13.349,37.6) 11.9,37.6 11.9,37.717 cw(c12.583,37.717) 12.1,38.2 ccw(c11.376,38.924) 12.4,38.924 12.4,43.9 12.4,49.164 cw(c31.075,49.164) 17.87,62.37 VPC.CJ.7.1
NetMCU.U.5_38: MCU.U.5.38 VPC.CJ.3.1 | length 52.9
  Top Layer w0.2: v1(11.4,36.1) ccw(c12.849,37.549) 12.849,35.5 MCU.U.5.38
  Top Layer w0.8: v1(10.6,51.8) 25.596,51.8 ccw(c25.596,61.467) 32.431,54.631 34.164,56.364 ccw(c28.764,61.763) 36.4,61.763 VPC.CJ.3.1
  Plane 2 w0.35: v1(10.6,51.8) ccw(c10.841,51.559) 10.5,51.559 10.5,38.052 ccw(c13.04,38.052) 11.244,36.256 v1(11.4,36.1)
NetMCU.U.5_40: MCU.U.5.40 VPC.CJ.4.1 | length 54.3
  Top Layer w0.2: v1(11.6,35) ccw(c12.324,35.724) 12.324,34.7 MCU.U.5.40
  Top Layer w0.8: v1(9.8,52.9) 25.879,52.9 ccw(c25.879,60.918) 31.549,55.249 32.122,55.822 ccw(c29.037,58.907) 33.4,58.907 33.4,63.414 ccw(c32.226,63.414) 33.056,64.244 VPC.CJ.4.1
  Plane 2 w0.35: v1(9.8,52.9) 9.8,36.766 ccw(c11.166,36.766) 10.2,35.8 10.576,35.424 ; 10.576,35.424 ccw(c11.6,36.449) v1(11.6,35)
NetMCU.U.5_46: MCU.U.5.46 USB.R.7.2 | length 64.8
  Top Layer w0.2: v1(15.5,34.3) 15.8,34 cw(c15.317,33.517) 16,33.517 MCU.U.5.46
  Top Layer w0.5: v1(28.2,43.4) cw(c28.924,43.4) 28.412,43.912 38.298,53.798 cw(c44.58,47.516) 44.58,56.4 44.874,56.4 cw(c44.874,47.646) 51.064,53.836 55.4,49.5 cw(c44.299,38.4) USB.R.7.2
  Bottom Layer w0.4: v1(15.5,34.3) 18.446,37.246 cw(c19.3,36.393) 19.3,37.6 ccw(c19.3,38.324) 19.812,37.812 24.656,42.656 cw(c26.452,40.86) 26.452,43.4 v1(28.2,43.4)
NetMCU.U.5_47: MCU.U.5.47 USB.R.8.2 | length 64.1
  Top Layer w0.2: MCU.U.5.47 16.4,33.517 cw(c17.083,33.517) 16.6,34 v1(16.8,34.2)
  Top Layer w0.5: v1(26.1,42.6) 38.151,54.651 cw(c44.063,48.74) 44.063,57.1 44.917,57.1 cw(c44.917,47.726) 51.546,54.354 58.838,47.062 cw(c52.176,40.4) USB.R.8.2
  Bottom Layer w0.4: v1(16.8,34.2) 17.356,34.756 cw(c19.152,32.96) 19.152,35.5 19.334,35.5 ccw(c19.334,36.866) 20.3,35.9 20.756,36.356 ccw(c18.96,38.152) 21.5,38.152 cw(c22.484,38.191) 21.788,38.888 25.076,42.176 cw(c26.1,41.151) v1(26.1,42.6)
NetMOS.C.10_2: MOS.C.10.2 MOS.C.11.2 MOS.U.2.3 | length 13.2
  Top Layer w0.8: MOS.C.11.2 33.608,36.556 cw(c35.405,34.76) 35.405,37.3 ; MOS.C.10.2 33.408,38.044 ccw(c35.205,39.84) 35.205,37.3 35.405,37.3 ; MOS.U.2.3 ccw(c42.497,35.925) 42.586,36.014 41.8,36.8 ccw(c40.593,35.593) 40.593,37.3 35.405,37.3
NetMOS.R.3_1: MOS.R.3.1 MOS.R.4.2 | length 2.8
  Top Layer w0.5: MOS.R.4.2 42.3,17.298 MOS.R.3.1
NetMOS.R.4_1: MOS.R.4.1 MOS.U.2.15 | length 8.4
  Top Layer w0.6: MOS.R.4.1 v1(40.3,18.5)
  Plane 2 w0.6: v1(40.3,18.5) 40.99,19.19 ccw(c39.194,20.986) 41.734,20.986 MOS.U.2.15
NetUSB.FB.1_1: USB.FB.1.1 USB.J.2.2 USB.J.2.11 USB.Z.1.4 USB.Z.1.5 | length 15.7
  Top Layer w0.5: USB.FB.1.1 ccw(c65.023,35.721) 65.023,35.55 USB.Z.1.4 USB.Z.1.5 67.9,34.883 ccw(c68.583,34.883) v3@68.1,34.4 ; v3@68.209,34.291 ccw(c68.55,34.633) 68.55,34.15 68.853,34.15 ccw(c68.853,34.747) 69.275,34.325 69.531,34.581 cw(c70,34.111) 70,34.775 USB.J.2.2 ; v3(71.175,39.35) USB.J.2.11
  Plane 2 w0.5: v3(67.85,34.275) 68.925,34.275 ccw(c68.925,36.75) 70.675,35 ccw(c69.468,36.207) 71.175,36.207 v3(71.175,39.35)
NetUSB.FB.2_1: USB.FB.2.1 USB.J.2.5 USB.J.2.8 USB.Z.1.3 | length 11
  Top Layer w0.27: USB.Z.1.3 66.95,37.504 ccw(c67.804,37.504) 67.2,36.9 ccw(c67.924,37.624) 67.924,36.6 69.7,36.6 USB.J.2.5 ; USB.J.2.5@70.893,36.158 71.85,35.825 71.909,35.825 ccw(c71.909,36.166) 72.15,35.925 72.196,35.971 ccw(c71.343,36.825) 72.55,36.825 ccw(c72.067,36.825) 72.409,37.166 72.35,37.225 USB.J.2.8@71.396,37.571
  Top Layer w0.5: USB.FB.2.1 cw(c65.723,38.279) 65.723,38.45 USB.Z.1.3
NetUSB.FB.2_2: USB.FB.2.2 USB.R.7.1 | length 1.6
  Top Layer w0.5: USB.R.7.1 USB.FB.2.2
NetUSB.FB.3_1: USB.FB.3.1 USB.J.2.6 USB.J.2.7 USB.Z.1.1 | length 6.5
  Top Layer w0.27: USB.Z.1.1 cw(c68.85,38.209) 69.021,38.379 69.8,37.6 USB.J.2.7 ccw(c71.983,36.57) 71.41,36.57 USB.J.2.6
  Top Layer w0.5: USB.FB.3.1 cw(c67.202,39.259) 68.009,40.066 68.375,39.7 cw(c67.228,38.553) 68.85,38.553 USB.Z.1.1
NetUSB.FB.3_2: USB.FB.3.2 USB.R.8.1 | length 1.6
  Top Layer w0.5: USB.R.8.1 USB.FB.3.2
NetUSB.J.2_3: USB.J.2.3 USB.Ra.1.5 USB.Ra.1.6 | length 9.4
  Top Layer w0.27: USB.Ra.1.5 USB.Ra.1.6 ccw(c70.186,42.525) 68.905,41.245 v3(69.15,41) ; v3(69.8,35.7) 69.875,35.45 USB.J.2.3
  Plane 2 w0.35: v3(69.15,41) 69.15,37.269 ccw(c71.369,37.269) v3(69.8,35.7)
NetUSB.J.2_9: USB.J.2.9 USB.Ra.1.7 USB.Ra.1.8 | length 6.5
  Top Layer w0.27: USB.Ra.1.7 USB.Ra.1.8 69.975,39.788 ccw(c71.938,39.788) 70.55,38.4 USB.J.2.9
V_USB: LED.C.20.2 LED.C.23.2 LED.C.25.2 LED.D.1.1 LED.D.3.1 LED.D.5.1 REG.C.12.2 REG.C.16.2 REG.U.3.1 REG.U.3.3 REG.U.4.1 REG.U.4.3 USB.FB.1.2 | length 140.2
  Top Layer w0.6: REG.C.12.2 ccw(c18.752,15.196) 21.15,15.196 REG.U.3.1 ; REG.C.16.2 47.709,10.862 ccw(c45.921,12.65) REG.U.4.1
  Top Layer w1: LED.D.1.1 4.1,37.7 4.1,31.594 ccw(c20.261,31.594) 8.833,20.167 15.139,13.861 ccw(c20.356,19.077) 20.356,11.7 22.848,11.7 ; REG.C.12.2 ccw(c21.287,13.5) 20.693,12.907 21.23,12.37 ; LED.C.23.2 22.56,11.112 cw(c23.844,9.827) 23.844,11.644 ; 21.231,12.369 ccw(c22.848,13.988) 22.848,11.7 ; LED.D.3.1 23.1,9.848 cw(c25.64,9.848) 23.844,11.644 ; 23.5,15.3 ccw(c23.983,15.783) 23.983,15.1 28.352,15.1 ; REG.C.16.2 47.648,9.609 ccw(c48.509,9.609) 47.9,9 ccw(c48.624,9.724) 48.624,8.7 49.1,8.7 ccw(c49.1,10.873) 50.636,9.336 51.156,9.856 ccw(c49.36,11.652) 51.9,11.652 51.9,13.405 51.9,14.6 ; 50.7,12.7 51.405,13.405 ccw(c50.21,14.6) 51.9,14.6 ; LED.D.5.1 60.521,27.766 ccw(c59.253,26.498) LED.C.25.2 cw(c60.71,29.748) 58.65,29.748 58.65,31.352 ; USB.FB.1.2 58.65,31.352 ; 22.848,11.7 ccw(c22.848,14.24) 24.644,12.444 ; 23.844,11.644 24.644,12.444 ; 24.644,12.444 26.556,14.356 cw(c28.352,12.56) 28.352,15.1 ; 28.352,15.1 32.169,15.1 ccw(c32.169,17.59) 33.929,15.829 37.3,19.2 cw(c39.956,16.544) 39.956,20.3 50.534,20.3 ccw(c50.534,25.528) 54.231,21.831 55.456,23.056 ccw(c53.66,24.852) 56.2,24.852 ; 51.9,14.6 51.9,17.31 cw(c54.29,17.31) 52.6,19 55.456,21.856 ccw(c53.66,23.652) 56.2,23.652 56.2,24.852 ; 56.2,24.852 56.2,27.85 cw(c58.74,27.85) 56.944,29.646 58.65,31.352
pads on no net: LBS.SW.1. LBS.SW.2. LED.R.18.1 MCH.FID.1.1 MCH.FID.2.1 MCU.U.5.24 MCU.U.5.25 MOS.U.2. MOS.U.2.1 MOS.U.2.2 MOS.U.2.6 MOS.U.2.14 MOS.U.2.16 REG.U.3.4 REG.U.4.4 USB.J.2. USB.J.2.4 USB.J.2.10 USB.Z.1.6

## Polygon pours and split planes (outlines as drawn)
GND on Plane 1 "Plane 1-GND" (solid, remove dead copper, pour order 16): -1,68 81,68 81,0 -1,0
3V3 on Plane 1 "Plane 1-3V3" (solid, pour order 0): 8,21 8,38.9 12.4,43.3 21.3,43.3 29,35.6 29,19 25,15 14,15
GND on Bottom Layer "Bottom Layer-GND" (solid, remove dead copper, pour order 14): -1,68 81,68 81,0 -1,0
GND on Top Layer "Top Layer-GND" (solid, remove dead copper, pour order 12): -1,68 81,68 81,0 -1,0
GND on Plane 2 "Plane 2-GND" (solid, remove dead copper, pour order 2): -1,68 81,68 81,0 -1,0

## Keep-outs
Keep-Out Layer:
  region: 7.598,1.307 cw(c9.927,10) 0.927,10 ccw(c0.127,10) 0.127,10.8 1.127,10.8 cw(c1.127,10) 1.927,10 ccw(c9.927,10) 8.401,2.147 8.191,0.534 ccw(c7.391,0.534)
  region: 46.47,66.8 ccw(c47.27,66.8) 47.27,66 47.27,65.996 48.809,65.988 cw(c48.718,62.989) 51.718,62.989 52.718,62.989 ccw(c48.718,62.989) 48.84,66.987 47.3,66.996 47.3,67 cw(c47.3,67.8) 46.5,67.8
  region: 0.127,63.2 1.1,63.2 ccw(c1.113,64.014) 1.927,64 cw(c3.927,64) 3.927,66 8.888,66 ccw(c8.888,66.313) 9.2,66.313 9.2,67.8 cw(c8.4,67.8) 8.4,67 3.927,67 ccw(c3.927,64) 0.927,64 cw(c0.127,64)
  region: 45.7,0.767 45.789,2.28 ccw(c41.843,30) 53.149,4.384 53.722,3.545 cw(c41.843,30) 46.379,1.357 ccw(c46.551,0.474)
  region: 1.025,49 cw(c-0.075,49) -0.075,47.9 -0.075,55.7 cw(c-0.075,54.6) 1.025,54.6
  region: 1.025,19 ccw(c-0.075,19) -0.075,20.1 -0.075,12.3 ccw(c-0.075,13.4) 1.025,13.4

## Silkscreen, mask and mechanical layers (free items; w line width, h text height)
Top Overlay:
  lines w0.8: 6.7,17.9 10.7,17.9 10.7,21.9 6.7,21.9 6.7,17.9
  text "BOOT / LOADER" at 27,19 h2.5
Bottom Overlay:
  text "R1.007" at 66.5,27.1 h2.4
  text "Licensed under the / CERN-OHL-S v2 / Copyright Ploopy  / 2024" at 68.4,21.2 h1.6
Board Outline:
  lines w0.2: -0.073,11 ccw(c0.127,11) 0.127,10.8 cw(c0.127,10) 0.927,10 ccw(c9.927,10) 7.598,1.307 cw(c7.391,0.534) 8.191,0.534 ccw(c8.721,0.534) 8.721,0.004 ; -0.073,63 cw(c0.127,63) 0.127,63.2 ccw(c0.127,64) 0.927,64 cw(c3.927,64) 3.927,67 ; 8.4,67 ccw(c8.4,67.8) 9.2,67.8 cw(c9.4,67.8) 9.4,68 ; 41.843,0 ccw(c41.843,30) 44.458,0.114 ; 45.021,0.176 ccw(c44.849,1.06) 45.7,0.767 cw(c46.551,0.474) 46.379,1.357 ccw(c41.843,30) 57.083,5.328 ; 46.3,68 cw(c46.3,67.8) 46.5,67.8 ccw(c47.3,67.8) 47.3,67 ; 48.84,66.987 cw(c48.718,62.989) 52.718,62.989 ccw(c54.718,62.989) 52.748,62.642 ; 53.841,59.085 ccw(c59.533,60.982) 63.719,56.683 cw(c67.207,53.101) 71.279,56.002 cw(c48,39.418) 74.047,51.187 cw(c33.038,32.658) 77.126,41.676 ; 57.263,5.451 ccw(c55.876,7.285) 58.137,6.867 ccw(c53.213,7.736) 57.707,9.928 cw(c63.099,12.559) 65.548,18.037 ccw(c67.589,22.601) 72.102,20.449 ; 78.991,41.012 cw(c78.824,40.541) 79.295,40.373

## Text inside footprints (layer, text, board x,y; h text height)
MOS.U.2: Top Overlay "Optic Side" at 34,26.2 h2 r90; Bottom Overlay "Sensor Side" at 54.217,26.125 h2 r270; Bottom Overlay "1" at 34.3,35.9 h4